# EAGLE board ZX_Distance_and_Gesture_Sensor_PTH_Panel_v10 (EAGLE 6.6.0), part 1 of 5
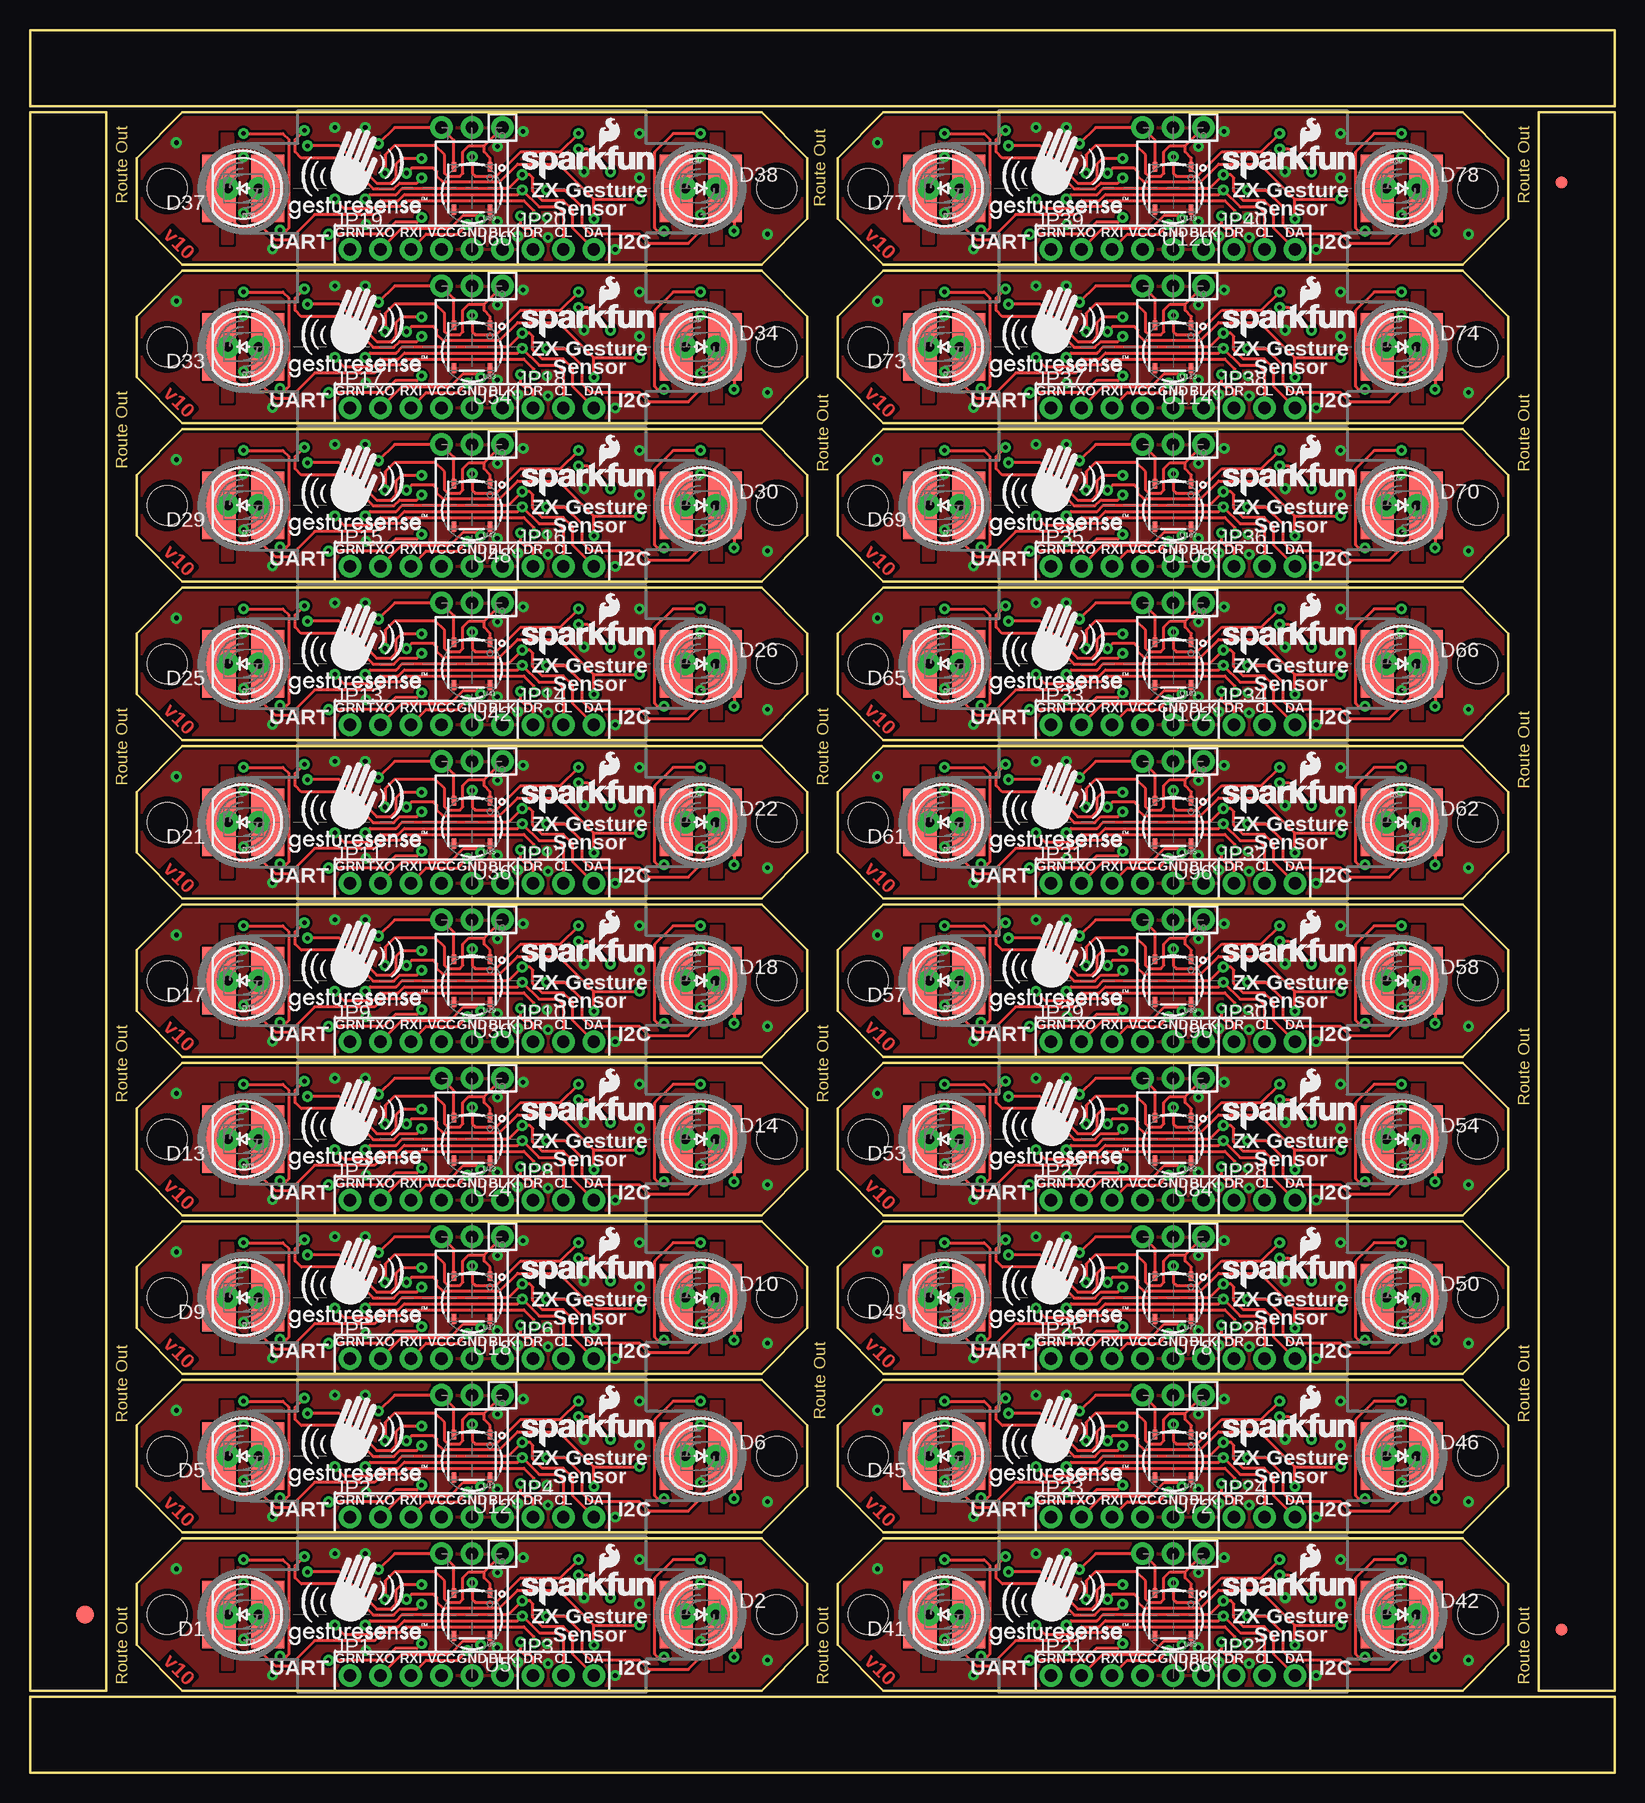
[diagram p0: board, top side]
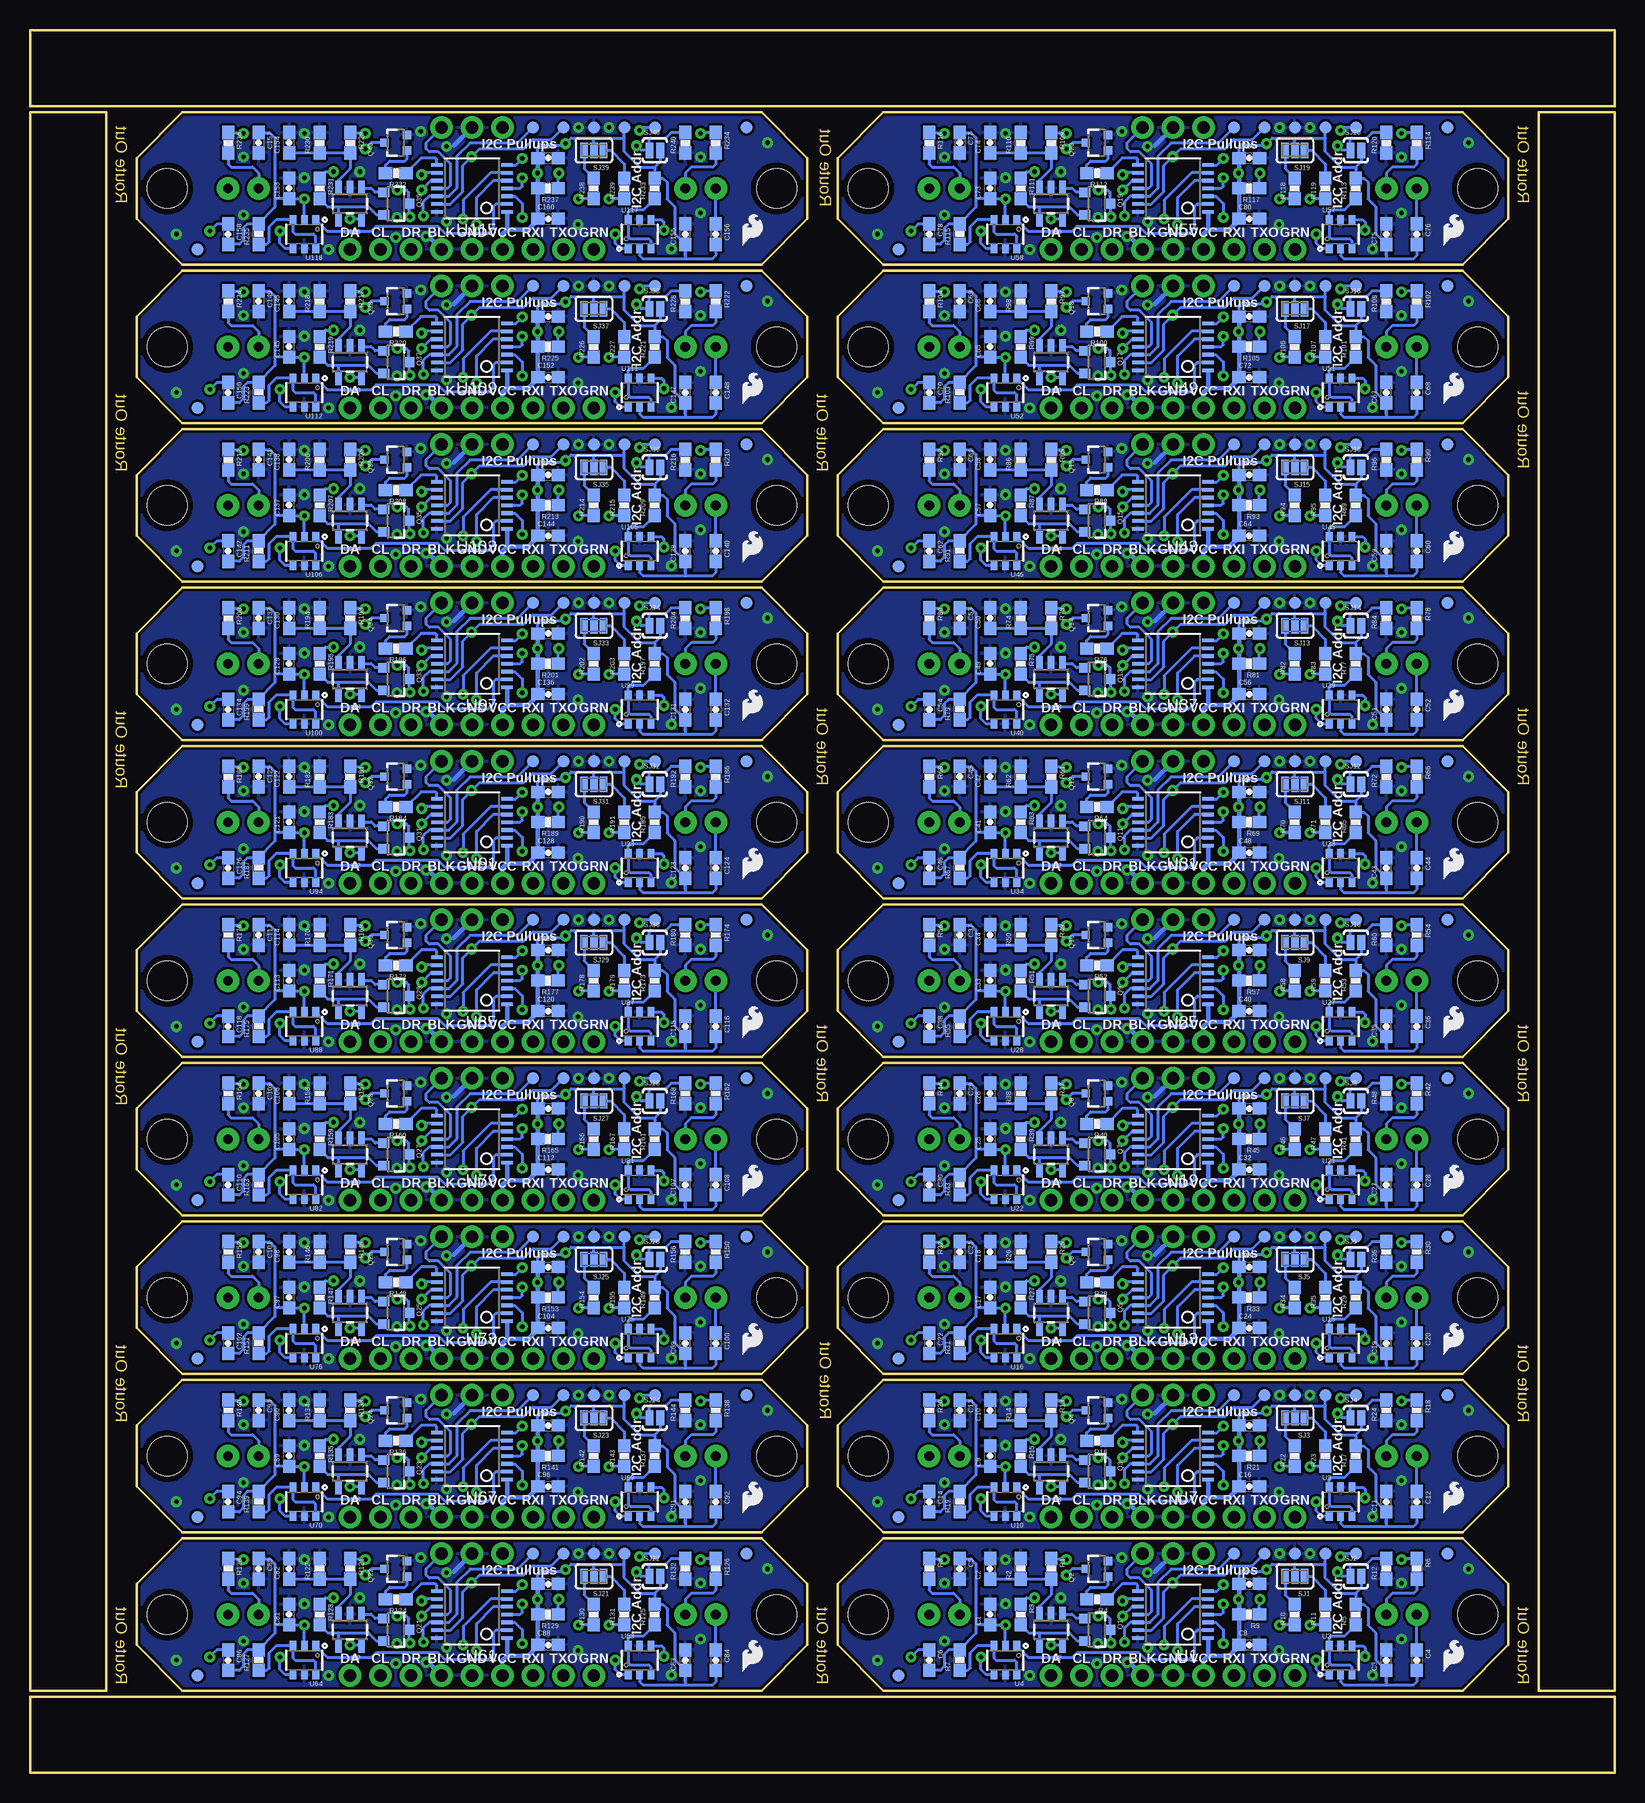
[diagram p1: board, bottom side, seen from below]

Size 132.08 x 145.29 mm. Coordinates in mm from the lower left corner, seen from the top.
Outline: 12.7,19.56 60.96,19.56 64.77,15.75 64.77,10.67 60.96,6.86 12.7,6.86 8.89,10.67 8.89,15.75 12.7,19.56
Outline: 12.7,32.77 60.96,32.77 64.77,28.96 64.77,23.88 60.96,20.07 12.7,20.07 8.89,23.88 8.89,28.96 12.7,32.77
Outline: 12.7,45.97 60.96,45.97 64.77,42.16 64.77,37.08 60.96,33.27 12.7,33.27 8.89,37.08 8.89,42.16 12.7,45.97
Outline: 12.7,59.18 60.96,59.18 64.77,55.37 64.77,50.29 60.96,46.48 12.7,46.48 8.89,50.29 8.89,55.37 12.7,59.18
Outline: 12.7,72.39 60.96,72.39 64.77,68.58 64.77,63.5 60.96,59.69 12.7,59.69 8.89,63.5 8.89,68.58 12.7,72.39
Outline: 12.7,85.6 60.96,85.6 64.77,81.79 64.77,76.71 60.96,72.9 12.7,72.9 8.89,76.71 8.89,81.79 12.7,85.6
Outline: 12.7,98.81 60.96,98.81 64.77,95 64.77,89.92 60.96,86.11 12.7,86.11 8.89,89.92 8.89,95 12.7,98.81
Outline: 12.7,112.01 60.96,112.01 64.77,108.2 64.77,103.12 60.96,99.31 12.7,99.31 8.89,103.12 8.89,108.2 12.7,112.01
Outline: 12.7,125.22 60.96,125.22 64.77,121.41 64.77,116.33 60.96,112.52 12.7,112.52 8.89,116.33 8.89,121.41 12.7,125.22
Outline: 12.7,138.43 60.96,138.43 64.77,134.62 64.77,129.54 60.96,125.73 12.7,125.73 8.89,129.54 8.89,134.62 12.7,138.43
Outline: 71.12,19.56 119.38,19.56 123.19,15.75 123.19,10.67 119.38,6.86 71.12,6.86 67.31,10.67 67.31,15.75 71.12,19.56
Outline: 71.12,32.77 119.38,32.77 123.19,28.96 123.19,23.88 119.38,20.07 71.12,20.07 67.31,23.88 67.31,28.96 71.12,32.77
Outline: 71.12,45.97 119.38,45.97 123.19,42.16 123.19,37.08 119.38,33.27 71.12,33.27 67.31,37.08 67.31,42.16 71.12,45.97
Outline: 71.12,59.18 119.38,59.18 123.19,55.37 123.19,50.29 119.38,46.48 71.12,46.48 67.31,50.29 67.31,55.37 71.12,59.18
Outline: 71.12,72.39 119.38,72.39 123.19,68.58 123.19,63.5 119.38,59.69 71.12,59.69 67.31,63.5 67.31,68.58 71.12,72.39
Outline: 71.12,85.6 119.38,85.6 123.19,81.79 123.19,76.71 119.38,72.9 71.12,72.9 67.31,76.71 67.31,81.79 71.12,85.6
Outline: 71.12,98.81 119.38,98.81 123.19,95 123.19,89.92 119.38,86.11 71.12,86.11 67.31,89.92 67.31,95 71.12,98.81
Outline: 71.12,112.01 119.38,112.01 123.19,108.2 123.19,103.12 119.38,99.31 71.12,99.31 67.31,103.12 67.31,108.2 71.12,112.01
Outline: 71.12,125.22 119.38,125.22 123.19,121.41 123.19,116.33 119.38,112.52 71.12,112.52 67.31,116.33 67.31,121.41 71.12,125.22
Outline: 71.12,138.43 119.38,138.43 123.19,134.62 123.19,129.54 119.38,125.73 71.12,125.73 67.31,129.54 67.31,134.62 71.12,138.43
Outline: 6.35,6.86 6.35,138.43 0,138.43 0,6.86 6.35,6.86
Outline: 132.08,6.86 132.08,138.43 125.73,138.43 125.73,6.86 132.08,6.86
Outline: 0,138.94 132.08,138.94 132.08,145.29 0,145.29 0,138.94
Outline: 132.08,6.35 0,6.35 0,0 132.08,0 132.08,6.35
Copper layers (1*16): Top 0.035mm / dielectric 1.5mm / Bottom 0.035mm
Design rules "SparkFun-2-layer": minimum track width 7mil, minimum drill 15mil, track to track 8mil, track to pad 8mil, pad to pad 8mil, via to via 8mil, smd to smd 8mil, copper to edge 8mil, drill to drill 8mil, minimum pad ring 12mil, minimum via ring 10mil, stop-mask expansion 4mil, vias tented up to drill 20mil, thermal gap 10mil
bRestrict: 40 lines

## Footprints (pad centres in the part's own frame; a part is rotated, then mirrored left to right if it is on the bottom)
0603-CAP = smd 1.1 x 1: 1 -0.85,0; 2 0.85,0
LED5MM = drill 0.813 pad 1.88: A -1.27,0; K 1.27,0
SFH4641-SHORT2 = smd 5.62 x 2.77: A 0,-2.035; C 0,2.035
FIDUCIAL-1.5X3 = smd 1.5 x 1.5: 1 0,0
FIDUCIAL-1X2 = smd 1 x 1: 1 0,0
1X06_NO_SILK = drill 1.016 pad 1.88: 1 0,0; 2 2.54,0; 3 5.08,0; 4 7.62,0; 5 10.16,0; 6 12.7,0
1X03_NO_SILK = drill 1.016 pad 1.88: 1 0,0; 2 2.54,0; 3 5.08,0
SOT23-3 = smd 0.8 x 0.9: 1 -0.95,-1; 2 0.95,-1; 3 0,1.1
SOT323 = smd 0.7 x 0.7: 1 -0.65,-0.925; 2 0.65,-0.925; 3 0,0.925
0603-RES = smd 1.1 x 1: 1 -0.85,0; 2 0.85,0
PAD-JUMPER-3-NC_BY_PASTE_YES_SILK_FULL_BOX = smd 0.635 x 1.27: 1 -0.813,0; 2 0,0; 3 0.813,0
PAD-JUMPER-2-NO_YES_SILK = smd 0.635 x 1.27: 1 -0.45,0; 2 0.45,0
STAND-OFF = hole 3.302: 0,0
PAD.03X.04 = smd 1.016 x 1.016: P$1 0,0
TSSOP14 = smd 0.305 x 0.991: 1 -1.95,-2.918; 2 -1.3,-2.918; 3 -0.65,-2.918; 4 0,-2.918; 5 0.65,-2.918; 6 1.3,-2.918; 7 1.95,-2.918; 8 1.95,2.918; 9 1.3,2.918; 10 0.65,2.918; 11 0,2.918; 12 -0.65,2.918; 13 -1.3,2.918; 14 -1.95,2.918
SOT23-5 = smd 0.55 x 1.2: 1 -0.95,-1.3; 2 0,-1.3; 3 0.95,-1.3; 4 0.95,1.3; 5 -0.95,1.3
SOT26 = smd 0.55 x 0.8: D1 -0.95,1.2; D2 0.95,1.2; G1 -0.95,-1.2; G2 0.95,-1.2; S1 0,1.2; S2 0,-1.2
BRM-2508_VERT = drill 1.016 pad 1.88: 1 -2.54,0; 2 0,0; 3 2.54,0
TSOP572 = smd 0.35 x 0.8: 1 -1.5,-1.775; 5 1.5,-1.775; 6 1.5,1.775; 8 -1.5,1.775

## Placement (x,y rotation side)
C1  0.1uF  [0603-CAP]  52.07,13.21 90 bottom
C2  DNP  [0603-CAP]  52.07,17.02 90 bottom
C3  0.1uF  [0603-CAP]  19.05,9.4 90 bottom
C4  10nF  [0603-CAP]  16.51,9.4 270 bottom
C5  0.1uF  [0603-CAP]  54.61,17.02 270 bottom
C6  10nF  [0603-CAP]  57.15,9.4 270 bottom
C7  4.7uF  [0603-CAP]  30.48,15.75 0 bottom
C8  0.1uF  [0603-CAP]  30.48,10.67 0 bottom
C9  0.1uF  [0603-CAP]  52.07,26.42 90 bottom
C10  DNP  [0603-CAP]  52.07,30.23 90 bottom
C11  0.1uF  [0603-CAP]  19.05,22.61 90 bottom
C12  10nF  [0603-CAP]  16.51,22.61 270 bottom
C13  0.1uF  [0603-CAP]  54.61,30.23 270 bottom
C14  10nF  [0603-CAP]  57.15,22.61 270 bottom
C15  4.7uF  [0603-CAP]  30.48,28.96 0 bottom
C16  0.1uF  [0603-CAP]  30.48,23.88 0 bottom
C17  0.1uF  [0603-CAP]  52.07,39.62 90 bottom
C18  DNP  [0603-CAP]  52.07,43.43 90 bottom
C19  0.1uF  [0603-CAP]  19.05,35.81 90 bottom
C20  10nF  [0603-CAP]  16.51,35.81 270 bottom
C21  0.1uF  [0603-CAP]  54.61,43.43 270 bottom
C22  10nF  [0603-CAP]  57.15,35.81 270 bottom
C23  4.7uF  [0603-CAP]  30.48,42.16 0 bottom
C24  0.1uF  [0603-CAP]  30.48,37.08 0 bottom
C25  0.1uF  [0603-CAP]  52.07,52.83 90 bottom
C26  DNP  [0603-CAP]  52.07,56.64 90 bottom
C27  0.1uF  [0603-CAP]  19.05,49.02 90 bottom
C28  10nF  [0603-CAP]  16.51,49.02 270 bottom
C29  0.1uF  [0603-CAP]  54.61,56.64 270 bottom
C30  10nF  [0603-CAP]  57.15,49.02 270 bottom
C31  4.7uF  [0603-CAP]  30.48,55.37 0 bottom
C32  0.1uF  [0603-CAP]  30.48,50.29 0 bottom
C33  0.1uF  [0603-CAP]  52.07,66.04 90 bottom
C34  DNP  [0603-CAP]  52.07,69.85 90 bottom
C35  0.1uF  [0603-CAP]  19.05,62.23 90 bottom
C36  10nF  [0603-CAP]  16.51,62.23 270 bottom
C37  0.1uF  [0603-CAP]  54.61,69.85 270 bottom
C38  10nF  [0603-CAP]  57.15,62.23 270 bottom
C39  4.7uF  [0603-CAP]  30.48,68.58 0 bottom
C40  0.1uF  [0603-CAP]  30.48,63.5 0 bottom
C41  0.1uF  [0603-CAP]  52.07,79.25 90 bottom
C42  DNP  [0603-CAP]  52.07,83.06 90 bottom
C43  0.1uF  [0603-CAP]  19.05,75.44 90 bottom
C44  10nF  [0603-CAP]  16.51,75.44 270 bottom
C45  0.1uF  [0603-CAP]  54.61,83.06 270 bottom
C46  10nF  [0603-CAP]  57.15,75.44 270 bottom
C47  4.7uF  [0603-CAP]  30.48,81.79 0 bottom
C48  0.1uF  [0603-CAP]  30.48,76.71 0 bottom
C49  0.1uF  [0603-CAP]  52.07,92.46 90 bottom
C50  DNP  [0603-CAP]  52.07,96.27 90 bottom
C51  0.1uF  [0603-CAP]  19.05,88.65 90 bottom
C52  10nF  [0603-CAP]  16.51,88.65 270 bottom
C53  0.1uF  [0603-CAP]  54.61,96.27 270 bottom
C54  10nF  [0603-CAP]  57.15,88.65 270 bottom
C55  4.7uF  [0603-CAP]  30.48,95 0 bottom
C56  0.1uF  [0603-CAP]  30.48,89.92 0 bottom
C57  0.1uF  [0603-CAP]  52.07,105.66 90 bottom
C58  DNP  [0603-CAP]  52.07,109.47 90 bottom
C59  0.1uF  [0603-CAP]  19.05,101.85 90 bottom
C60  10nF  [0603-CAP]  16.51,101.85 270 bottom
C61  0.1uF  [0603-CAP]  54.61,109.47 270 bottom
C62  10nF  [0603-CAP]  57.15,101.85 270 bottom
C63  4.7uF  [0603-CAP]  30.48,108.2 0 bottom
C64  0.1uF  [0603-CAP]  30.48,103.12 0 bottom
C65  0.1uF  [0603-CAP]  52.07,118.87 90 bottom
C66  DNP  [0603-CAP]  52.07,122.68 90 bottom
C67  0.1uF  [0603-CAP]  19.05,115.06 90 bottom
C68  10nF  [0603-CAP]  16.51,115.06 270 bottom
C69  0.1uF  [0603-CAP]  54.61,122.68 270 bottom
C70  10nF  [0603-CAP]  57.15,115.06 270 bottom
C71  4.7uF  [0603-CAP]  30.48,121.41 0 bottom
C72  0.1uF  [0603-CAP]  30.48,116.33 0 bottom
C73  0.1uF  [0603-CAP]  52.07,132.08 90 bottom
C74  DNP  [0603-CAP]  52.07,135.89 90 bottom
C75  0.1uF  [0603-CAP]  19.05,128.27 90 bottom
C76  10nF  [0603-CAP]  16.51,128.27 270 bottom
C77  0.1uF  [0603-CAP]  54.61,135.89 270 bottom
C78  10nF  [0603-CAP]  57.15,128.27 270 bottom
C79  4.7uF  [0603-CAP]  30.48,134.62 0 bottom
C80  0.1uF  [0603-CAP]  30.48,129.54 0 bottom
C81  0.1uF  [0603-CAP]  110.49,13.21 90 bottom
C82  DNP  [0603-CAP]  110.49,17.02 90 bottom
C83  0.1uF  [0603-CAP]  77.47,9.4 90 bottom
C84  10nF  [0603-CAP]  74.93,9.4 270 bottom
C85  0.1uF  [0603-CAP]  113.03,17.02 270 bottom
C86  10nF  [0603-CAP]  115.57,9.4 270 bottom
C87  4.7uF  [0603-CAP]  88.9,15.75 0 bottom
C88  0.1uF  [0603-CAP]  88.9,10.67 0 bottom
C89  0.1uF  [0603-CAP]  110.49,26.42 90 bottom
C90  DNP  [0603-CAP]  110.49,30.23 90 bottom
C91  0.1uF  [0603-CAP]  77.47,22.61 90 bottom
C92  10nF  [0603-CAP]  74.93,22.61 270 bottom
C93  0.1uF  [0603-CAP]  113.03,30.23 270 bottom
C94  10nF  [0603-CAP]  115.57,22.61 270 bottom
C95  4.7uF  [0603-CAP]  88.9,28.96 0 bottom
C96  0.1uF  [0603-CAP]  88.9,23.88 0 bottom
C97  0.1uF  [0603-CAP]  110.49,39.62 90 bottom
C98  DNP  [0603-CAP]  110.49,43.43 90 bottom
C99  0.1uF  [0603-CAP]  77.47,35.81 90 bottom
C100  10nF  [0603-CAP]  74.93,35.81 270 bottom
C101  0.1uF  [0603-CAP]  113.03,43.43 270 bottom
C102  10nF  [0603-CAP]  115.57,35.81 270 bottom
C103  4.7uF  [0603-CAP]  88.9,42.16 0 bottom
C104  0.1uF  [0603-CAP]  88.9,37.08 0 bottom
C105  0.1uF  [0603-CAP]  110.49,52.83 90 bottom
C106  DNP  [0603-CAP]  110.49,56.64 90 bottom
C107  0.1uF  [0603-CAP]  77.47,49.02 90 bottom
C108  10nF  [0603-CAP]  74.93,49.02 270 bottom
C109  0.1uF  [0603-CAP]  113.03,56.64 270 bottom
C110  10nF  [0603-CAP]  115.57,49.02 270 bottom
C111  4.7uF  [0603-CAP]  88.9,55.37 0 bottom
C112  0.1uF  [0603-CAP]  88.9,50.29 0 bottom
C113  0.1uF  [0603-CAP]  110.49,66.04 90 bottom
C114  DNP  [0603-CAP]  110.49,69.85 90 bottom
C115  0.1uF  [0603-CAP]  77.47,62.23 90 bottom
C116  10nF  [0603-CAP]  74.93,62.23 270 bottom
C117  0.1uF  [0603-CAP]  113.03,69.85 270 bottom
C118  10nF  [0603-CAP]  115.57,62.23 270 bottom
C119  4.7uF  [0603-CAP]  88.9,68.58 0 bottom
C120  0.1uF  [0603-CAP]  88.9,63.5 0 bottom
C121  0.1uF  [0603-CAP]  110.49,79.25 90 bottom
C122  DNP  [0603-CAP]  110.49,83.06 90 bottom
C123  0.1uF  [0603-CAP]  77.47,75.44 90 bottom
C124  10nF  [0603-CAP]  74.93,75.44 270 bottom
C125  0.1uF  [0603-CAP]  113.03,83.06 270 bottom
C126  10nF  [0603-CAP]  115.57,75.44 270 bottom
C127  4.7uF  [0603-CAP]  88.9,81.79 0 bottom
C128  0.1uF  [0603-CAP]  88.9,76.71 0 bottom
C129  0.1uF  [0603-CAP]  110.49,92.46 90 bottom
C130  DNP  [0603-CAP]  110.49,96.27 90 bottom
C131  0.1uF  [0603-CAP]  77.47,88.65 90 bottom
C132  10nF  [0603-CAP]  74.93,88.65 270 bottom
C133  0.1uF  [0603-CAP]  113.03,96.27 270 bottom
C134  10nF  [0603-CAP]  115.57,88.65 270 bottom
C135  4.7uF  [0603-CAP]  88.9,95 0 bottom
C136  0.1uF  [0603-CAP]  88.9,89.92 0 bottom
C137  0.1uF  [0603-CAP]  110.49,105.66 90 bottom
C138  DNP  [0603-CAP]  110.49,109.47 90 bottom
C139  0.1uF  [0603-CAP]  77.47,101.85 90 bottom
C140  10nF  [0603-CAP]  74.93,101.85 270 bottom
C141  0.1uF  [0603-CAP]  113.03,109.47 270 bottom
C142  10nF  [0603-CAP]  115.57,101.85 270 bottom
C143  4.7uF  [0603-CAP]  88.9,108.2 0 bottom
C144  0.1uF  [0603-CAP]  88.9,103.12 0 bottom
C145  0.1uF  [0603-CAP]  110.49,118.87 90 bottom
C146  DNP  [0603-CAP]  110.49,122.68 90 bottom
C147  0.1uF  [0603-CAP]  77.47,115.06 90 bottom
C148  10nF  [0603-CAP]  74.93,115.06 270 bottom
C149  0.1uF  [0603-CAP]  113.03,122.68 270 bottom
C150  10nF  [0603-CAP]  115.57,115.06 270 bottom
C151  4.7uF  [0603-CAP]  88.9,121.41 0 bottom
C152  0.1uF  [0603-CAP]  88.9,116.33 0 bottom
C153  0.1uF  [0603-CAP]  110.49,132.08 90 bottom
C154  DNP  [0603-CAP]  110.49,135.89 90 bottom
C155  0.1uF  [0603-CAP]  77.47,128.27 90 bottom
C156  10nF  [0603-CAP]  74.93,128.27 270 bottom
C157  0.1uF  [0603-CAP]  113.03,135.89 270 bottom
C158  10nF  [0603-CAP]  115.57,128.27 270 bottom
C159  4.7uF  [0603-CAP]  88.9,134.62 0 bottom
C160  0.1uF  [0603-CAP]  88.9,129.54 0 bottom
D1  LED-IR-THRUTSAL6100  [LED5MM]  17.78,13.21 180 top
D2  LED-IR-THRUTSAL6100  [LED5MM]  55.88,13.21 0 top
D3  SFH4641SHORT2  [SFH4641-SHORT2]  17.78,13.21 90 top
D4  SFH4641SHORT2  [SFH4641-SHORT2]  55.88,13.21 270 top
D5  LED-IR-THRUTSAL6100  [LED5MM]  17.78,26.42 180 top
D6  LED-IR-THRUTSAL6100  [LED5MM]  55.88,26.42 0 top
D7  SFH4641SHORT2  [SFH4641-SHORT2]  17.78,26.42 90 top
D8  SFH4641SHORT2  [SFH4641-SHORT2]  55.88,26.42 270 top
D9  LED-IR-THRUTSAL6100  [LED5MM]  17.78,39.62 180 top
D10  LED-IR-THRUTSAL6100  [LED5MM]  55.88,39.62 0 top
D11  SFH4641SHORT2  [SFH4641-SHORT2]  17.78,39.62 90 top
D12  SFH4641SHORT2  [SFH4641-SHORT2]  55.88,39.62 270 top
D13  LED-IR-THRUTSAL6100  [LED5MM]  17.78,52.83 180 top
D14  LED-IR-THRUTSAL6100  [LED5MM]  55.88,52.83 0 top
D15  SFH4641SHORT2  [SFH4641-SHORT2]  17.78,52.83 90 top
D16  SFH4641SHORT2  [SFH4641-SHORT2]  55.88,52.83 270 top
D17  LED-IR-THRUTSAL6100  [LED5MM]  17.78,66.04 180 top
D18  LED-IR-THRUTSAL6100  [LED5MM]  55.88,66.04 0 top
D19  SFH4641SHORT2  [SFH4641-SHORT2]  17.78,66.04 90 top
D20  SFH4641SHORT2  [SFH4641-SHORT2]  55.88,66.04 270 top
D21  LED-IR-THRUTSAL6100  [LED5MM]  17.78,79.25 180 top
D22  LED-IR-THRUTSAL6100  [LED5MM]  55.88,79.25 0 top
D23  SFH4641SHORT2  [SFH4641-SHORT2]  17.78,79.25 90 top
D24  SFH4641SHORT2  [SFH4641-SHORT2]  55.88,79.25 270 top
D25  LED-IR-THRUTSAL6100  [LED5MM]  17.78,92.46 180 top
D26  LED-IR-THRUTSAL6100  [LED5MM]  55.88,92.46 0 top
D27  SFH4641SHORT2  [SFH4641-SHORT2]  17.78,92.46 90 top
D28  SFH4641SHORT2  [SFH4641-SHORT2]  55.88,92.46 270 top
D29  LED-IR-THRUTSAL6100  [LED5MM]  17.78,105.66 180 top
D30  LED-IR-THRUTSAL6100  [LED5MM]  55.88,105.66 0 top
D31  SFH4641SHORT2  [SFH4641-SHORT2]  17.78,105.66 90 top
D32  SFH4641SHORT2  [SFH4641-SHORT2]  55.88,105.66 270 top
D33  LED-IR-THRUTSAL6100  [LED5MM]  17.78,118.87 180 top
D34  LED-IR-THRUTSAL6100  [LED5MM]  55.88,118.87 0 top
D35  SFH4641SHORT2  [SFH4641-SHORT2]  17.78,118.87 90 top
D36  SFH4641SHORT2  [SFH4641-SHORT2]  55.88,118.87 270 top
D37  LED-IR-THRUTSAL6100  [LED5MM]  17.78,132.08 180 top
D38  LED-IR-THRUTSAL6100  [LED5MM]  55.88,132.08 0 top
D39  SFH4641SHORT2  [SFH4641-SHORT2]  17.78,132.08 90 top
D40  SFH4641SHORT2  [SFH4641-SHORT2]  55.88,132.08 270 top
D41  LED-IR-THRUTSAL6100  [LED5MM]  76.2,13.21 180 top
D42  LED-IR-THRUTSAL6100  [LED5MM]  114.3,13.21 0 top
D43  SFH4641SHORT2  [SFH4641-SHORT2]  76.2,13.21 90 top
D44  SFH4641SHORT2  [SFH4641-SHORT2]  114.3,13.21 270 top
D45  LED-IR-THRUTSAL6100  [LED5MM]  76.2,26.42 180 top
D46  LED-IR-THRUTSAL6100  [LED5MM]  114.3,26.42 0 top
D47  SFH4641SHORT2  [SFH4641-SHORT2]  76.2,26.42 90 top
D48  SFH4641SHORT2  [SFH4641-SHORT2]  114.3,26.42 270 top
D49  LED-IR-THRUTSAL6100  [LED5MM]  76.2,39.62 180 top
D50  LED-IR-THRUTSAL6100  [LED5MM]  114.3,39.62 0 top
D51  SFH4641SHORT2  [SFH4641-SHORT2]  76.2,39.62 90 top
D52  SFH4641SHORT2  [SFH4641-SHORT2]  114.3,39.62 270 top
D53  LED-IR-THRUTSAL6100  [LED5MM]  76.2,52.83 180 top
D54  LED-IR-THRUTSAL6100  [LED5MM]  114.3,52.83 0 top
D55  SFH4641SHORT2  [SFH4641-SHORT2]  76.2,52.83 90 top
D56  SFH4641SHORT2  [SFH4641-SHORT2]  114.3,52.83 270 top
D57  LED-IR-THRUTSAL6100  [LED5MM]  76.2,66.04 180 top
D58  LED-IR-THRUTSAL6100  [LED5MM]  114.3,66.04 0 top
D59  SFH4641SHORT2  [SFH4641-SHORT2]  76.2,66.04 90 top
D60  SFH4641SHORT2  [SFH4641-SHORT2]  114.3,66.04 270 top
D61  LED-IR-THRUTSAL6100  [LED5MM]  76.2,79.25 180 top
D62  LED-IR-THRUTSAL6100  [LED5MM]  114.3,79.25 0 top
D63  SFH4641SHORT2  [SFH4641-SHORT2]  76.2,79.25 90 top
D64  SFH4641SHORT2  [SFH4641-SHORT2]  114.3,79.25 270 top
D65  LED-IR-THRUTSAL6100  [LED5MM]  76.2,92.46 180 top
D66  LED-IR-THRUTSAL6100  [LED5MM]  114.3,92.46 0 top
D67  SFH4641SHORT2  [SFH4641-SHORT2]  76.2,92.46 90 top
D68  SFH4641SHORT2  [SFH4641-SHORT2]  114.3,92.46 270 top
D69  LED-IR-THRUTSAL6100  [LED5MM]  76.2,105.66 180 top
D70  LED-IR-THRUTSAL6100  [LED5MM]  114.3,105.66 0 top
D71  SFH4641SHORT2  [SFH4641-SHORT2]  76.2,105.66 90 top
D72  SFH4641SHORT2  [SFH4641-SHORT2]  114.3,105.66 270 top
D73  LED-IR-THRUTSAL6100  [LED5MM]  76.2,118.87 180 top
D74  LED-IR-THRUTSAL6100  [LED5MM]  114.3,118.87 0 top
D75  SFH4641SHORT2  [SFH4641-SHORT2]  76.2,118.87 90 top
D76  SFH4641SHORT2  [SFH4641-SHORT2]  114.3,118.87 270 top
D77  LED-IR-THRUTSAL6100  [LED5MM]  76.2,132.08 180 top
D78  LED-IR-THRUTSAL6100  [LED5MM]  114.3,132.08 0 top
D79  SFH4641SHORT2  [SFH4641-SHORT2]  76.2,132.08 90 top
D80  SFH4641SHORT2  [SFH4641-SHORT2]  114.3,132.08 270 top
E$1  [FIDUCIAL-1.5X3]  4.57,13.21 0 top
E$2  [FIDUCIAL-1X2]  127.64,11.94 0 top
E$5  [FIDUCIAL-1X2]  127.64,132.59 180 top
FID1  FIDUCIAL1X2  [FIDUCIAL-1X2]  13.97,18.29 0 bottom
FID2  FIDUCIAL1X2  [FIDUCIAL-1X2]  59.69,8.13 0 bottom
FID3  FIDUCIAL1X2  [FIDUCIAL-1X2]  13.97,31.5 0 bottom
FID4  FIDUCIAL1X2  [FIDUCIAL-1X2]  59.69,21.34 0 bottom
FID5  FIDUCIAL1X2  [FIDUCIAL-1X2]  13.97,44.7 0 bottom
FID6  FIDUCIAL1X2  [FIDUCIAL-1X2]  59.69,34.54 0 bottom
FID7  FIDUCIAL1X2  [FIDUCIAL-1X2]  13.97,57.91 0 bottom
FID8  FIDUCIAL1X2  [FIDUCIAL-1X2]  59.69,47.75 0 bottom
FID9  FIDUCIAL1X2  [FIDUCIAL-1X2]  13.97,71.12 0 bottom
FID10  FIDUCIAL1X2  [FIDUCIAL-1X2]  59.69,60.96 0 bottom
FID11  FIDUCIAL1X2  [FIDUCIAL-1X2]  13.97,84.33 0 bottom
FID12  FIDUCIAL1X2  [FIDUCIAL-1X2]  59.69,74.17 0 bottom
FID13  FIDUCIAL1X2  [FIDUCIAL-1X2]  13.97,97.54 0 bottom
FID14  FIDUCIAL1X2  [FIDUCIAL-1X2]  59.69,87.38 0 bottom
FID15  FIDUCIAL1X2  [FIDUCIAL-1X2]  13.97,110.74 0 bottom
FID16  FIDUCIAL1X2  [FIDUCIAL-1X2]  59.69,100.58 0 bottom
FID17  FIDUCIAL1X2  [FIDUCIAL-1X2]  13.97,123.95 0 bottom
FID18  FIDUCIAL1X2  [FIDUCIAL-1X2]  59.69,113.79 0 bottom
FID19  FIDUCIAL1X2  [FIDUCIAL-1X2]  13.97,137.16 0 bottom
FID20  FIDUCIAL1X2  [FIDUCIAL-1X2]  59.69,127 0 bottom
FID21  FIDUCIAL1X2  [FIDUCIAL-1X2]  72.39,18.29 0 bottom
FID22  FIDUCIAL1X2  [FIDUCIAL-1X2]  118.11,8.13 0 bottom
FID23  FIDUCIAL1X2  [FIDUCIAL-1X2]  72.39,31.5 0 bottom
FID24  FIDUCIAL1X2  [FIDUCIAL-1X2]  118.11,21.34 0 bottom
FID25  FIDUCIAL1X2  [FIDUCIAL-1X2]  72.39,44.7 0 bottom
FID26  FIDUCIAL1X2  [FIDUCIAL-1X2]  118.11,34.54 0 bottom
FID27  FIDUCIAL1X2  [FIDUCIAL-1X2]  72.39,57.91 0 bottom
FID28  FIDUCIAL1X2  [FIDUCIAL-1X2]  118.11,47.75 0 bottom
FID29  FIDUCIAL1X2  [FIDUCIAL-1X2]  72.39,71.12 0 bottom
FID30  FIDUCIAL1X2  [FIDUCIAL-1X2]  118.11,60.96 0 bottom
FID31  FIDUCIAL1X2  [FIDUCIAL-1X2]  72.39,84.33 0 bottom
FID32  FIDUCIAL1X2  [FIDUCIAL-1X2]  118.11,74.17 0 bottom
FID33  FIDUCIAL1X2  [FIDUCIAL-1X2]  72.39,97.54 0 bottom
FID34  FIDUCIAL1X2  [FIDUCIAL-1X2]  118.11,87.38 0 bottom
FID35  FIDUCIAL1X2  [FIDUCIAL-1X2]  72.39,110.74 0 bottom
FID36  FIDUCIAL1X2  [FIDUCIAL-1X2]  118.11,100.58 0 bottom
FID37  FIDUCIAL1X2  [FIDUCIAL-1X2]  72.39,123.95 0 bottom
FID38  FIDUCIAL1X2  [FIDUCIAL-1X2]  118.11,113.79 0 bottom
FID39  FIDUCIAL1X2  [FIDUCIAL-1X2]  72.39,137.16 0 bottom
FID40  FIDUCIAL1X2  [FIDUCIAL-1X2]  118.11,127 0 bottom
JP1  [1X06_NO_SILK]  26.67,8.13 0 top
JP2  [1X06_NO_SILK]  26.67,21.34 0 top
JP3  [1X03_NO_SILK]  41.91,8.13 0 top
JP4  [1X03_NO_SILK]  41.91,21.34 0 top
JP5  [1X06_NO_SILK]  26.67,34.54 0 top
JP6  [1X03_NO_SILK]  41.91,34.54 0 top
JP7  [1X06_NO_SILK]  26.67,47.75 0 top
JP8  [1X03_NO_SILK]  41.91,47.75 0 top
JP9  [1X06_NO_SILK]  26.67,60.96 0 top
JP10  [1X03_NO_SILK]  41.91,60.96 0 top
JP11  [1X06_NO_SILK]  26.67,74.17 0 top
JP12  [1X03_NO_SILK]  41.91,74.17 0 top
JP13  [1X06_NO_SILK]  26.67,87.38 0 top
JP14  [1X03_NO_SILK]  41.91,87.38 0 top
JP15  [1X06_NO_SILK]  26.67,100.58 0 top
JP16  [1X03_NO_SILK]  41.91,100.58 0 top
JP17  [1X06_NO_SILK]  26.67,113.79 0 top
JP18  [1X03_NO_SILK]  41.91,113.79 0 top
JP19  [1X06_NO_SILK]  26.67,127 0 top
JP20  [1X03_NO_SILK]  41.91,127 0 top
JP21  [1X06_NO_SILK]  85.09,8.13 0 top
JP22  [1X03_NO_SILK]  100.33,8.13 0 top
JP23  [1X06_NO_SILK]  85.09,21.34 0 top
JP24  [1X03_NO_SILK]  100.33,21.34 0 top
JP25  [1X06_NO_SILK]  85.09,34.54 0 top
JP26  [1X03_NO_SILK]  100.33,34.54 0 top
JP27  [1X06_NO_SILK]  85.09,47.75 0 top
JP28  [1X03_NO_SILK]  100.33,47.75 0 top
JP29  [1X06_NO_SILK]  85.09,60.96 0 top
JP30  [1X03_NO_SILK]  100.33,60.96 0 top
JP31  [1X06_NO_SILK]  85.09,74.17 0 top
JP32  [1X03_NO_SILK]  100.33,74.17 0 top
JP33  [1X06_NO_SILK]  85.09,87.38 0 top
JP34  [1X03_NO_SILK]  100.33,87.38 0 top
JP35  [1X06_NO_SILK]  85.09,100.58 0 top
JP36  [1X03_NO_SILK]  100.33,100.58 0 top
JP37  [1X06_NO_SILK]  85.09,113.79 0 top
JP38  [1X03_NO_SILK]  100.33,113.79 0 top
JP39  [1X06_NO_SILK]  85.09,127 0 top
JP40  [1X03_NO_SILK]  100.33,127 0 top
LOGO1  SFE_LOGO_FLAME.1_INCH  [SFE_LOGO_FLAME_.1]  14.61,8.13 0 bottom
LOGO2  SFE_LOGO_FLAME.1_INCH  [SFE_LOGO_FLAME_.1]  14.61,21.34 0 bottom
LOGO3  SFE_LOGO_FLAME.1_INCH  [SFE_LOGO_FLAME_.1]  14.61,34.54 0 bottom
LOGO4  SFE_LOGO_FLAME.1_INCH  [SFE_LOGO_FLAME_.1]  14.61,47.75 0 bottom
LOGO5  SFE_LOGO_FLAME.1_INCH  [SFE_LOGO_FLAME_.1]  14.61,60.96 0 bottom
LOGO6  SFE_LOGO_FLAME.1_INCH  [SFE_LOGO_FLAME_.1]  14.61,74.17 0 bottom
LOGO7  SFE_LOGO_FLAME.1_INCH  [SFE_LOGO_FLAME_.1]  14.61,87.38 0 bottom
LOGO8  SFE_LOGO_FLAME.1_INCH  [SFE_LOGO_FLAME_.1]  14.61,100.58 0 bottom
LOGO9  SFE_LOGO_FLAME.1_INCH  [SFE_LOGO_FLAME_.1]  14.61,113.79 0 bottom
LOGO10  SFE_LOGO_FLAME.1_INCH  [SFE_LOGO_FLAME_.1]  14.61,127 0 bottom
LOGO11  SFE_LOGO_FLAME.1_INCH  [SFE_LOGO_FLAME_.1]  73.03,8.13 0 bottom
LOGO12  SFE_LOGO_FLAME.1_INCH  [SFE_LOGO_FLAME_.1]  73.03,21.34 0 bottom
LOGO13  SFE_LOGO_FLAME.1_INCH  [SFE_LOGO_FLAME_.1]  73.03,34.54 0 bottom
LOGO14  SFE_LOGO_FLAME.1_INCH  [SFE_LOGO_FLAME_.1]  73.03,47.75 0 bottom
LOGO15  SFE_LOGO_FLAME.1_INCH  [SFE_LOGO_FLAME_.1]  73.03,60.96 0 bottom
LOGO16  SFE_LOGO_FLAME.1_INCH  [SFE_LOGO_FLAME_.1]  73.03,74.17 0 bottom
LOGO17  SFE_LOGO_FLAME.1_INCH  [SFE_LOGO_FLAME_.1]  73.03,87.38 0 bottom
LOGO18  SFE_LOGO_FLAME.1_INCH  [SFE_LOGO_FLAME_.1]  73.03,100.58 0 bottom
LOGO19  SFE_LOGO_FLAME.1_INCH  [SFE_LOGO_FLAME_.1]  73.03,113.79 0 bottom
LOGO20  SFE_LOGO_FLAME.1_INCH  [SFE_LOGO_FLAME_.1]  73.03,127 0 bottom
Q1  MMBT2222A  [SOT23-3]  43.18,11.94 270 bottom
Q2  MOSFET-NCHANNEL2N7002PW  [SOT323]  43.18,17.02 90 bottom
Q3  MMBT2222A  [SOT23-3]  43.18,25.15 270 bottom
Q4  MOSFET-NCHANNEL2N7002PW  [SOT323]  43.18,30.23 90 bottom
Q5  MMBT2222A  [SOT23-3]  43.18,38.35 270 bottom
Q6  MOSFET-NCHANNEL2N7002PW  [SOT323]  43.18,43.43 90 bottom
Q7  MMBT2222A  [SOT23-3]  43.18,51.56 270 bottom
Q8  MOSFET-NCHANNEL2N7002PW  [SOT323]  43.18,56.64 90 bottom
Q9  MMBT2222A  [SOT23-3]  43.18,64.77 270 bottom
Q10  MOSFET-NCHANNEL2N7002PW  [SOT323]  43.18,69.85 90 bottom
Q11  MMBT2222A  [SOT23-3]  43.18,77.98 270 bottom
Q12  MOSFET-NCHANNEL2N7002PW  [SOT323]  43.18,83.06 90 bottom
Q13  MMBT2222A  [SOT23-3]  43.18,91.19 270 bottom
Q14  MOSFET-NCHANNEL2N7002PW  [SOT323]  43.18,96.27 90 bottom
Q15  MMBT2222A  [SOT23-3]  43.18,104.39 270 bottom
Q16  MOSFET-NCHANNEL2N7002PW  [SOT323]  43.18,109.47 90 bottom
Q17  MMBT2222A  [SOT23-3]  43.18,117.6 270 bottom
Q18  MOSFET-NCHANNEL2N7002PW  [SOT323]  43.18,122.68 90 bottom
Q19  MMBT2222A  [SOT23-3]  43.18,130.81 270 bottom
Q20  MOSFET-NCHANNEL2N7002PW  [SOT323]  43.18,135.89 90 bottom
Q21  MMBT2222A  [SOT23-3]  101.6,11.94 270 bottom
Q22  MOSFET-NCHANNEL2N7002PW  [SOT323]  101.6,17.02 90 bottom
Q23  MMBT2222A  [SOT23-3]  101.6,25.15 270 bottom
Q24  MOSFET-NCHANNEL2N7002PW  [SOT323]  101.6,30.23 90 bottom
Q25  MMBT2222A  [SOT23-3]  101.6,38.35 270 bottom
Q26  MOSFET-NCHANNEL2N7002PW  [SOT323]  101.6,43.43 90 bottom
Q27  MMBT2222A  [SOT23-3]  101.6,51.56 270 bottom
Q28  MOSFET-NCHANNEL2N7002PW  [SOT323]  101.6,56.64 90 bottom
Q29  MMBT2222A  [SOT23-3]  101.6,64.77 270 bottom
Q30  MOSFET-NCHANNEL2N7002PW  [SOT323]  101.6,69.85 90 bottom
Q31  MMBT2222A  [SOT23-3]  101.6,77.98 270 bottom
Q32  MOSFET-NCHANNEL2N7002PW  [SOT323]  101.6,83.06 90 bottom
Q33  MMBT2222A  [SOT23-3]  101.6,91.19 270 bottom
Q34  MOSFET-NCHANNEL2N7002PW  [SOT323]  101.6,96.27 90 bottom
Q35  MMBT2222A  [SOT23-3]  101.6,104.39 270 bottom
Q36  MOSFET-NCHANNEL2N7002PW  [SOT323]  101.6,109.47 90 bottom
Q37  MMBT2222A  [SOT23-3]  101.6,117.6 270 bottom
Q38  MOSFET-NCHANNEL2N7002PW  [SOT323]  101.6,122.68 90 bottom
Q39  MMBT2222A  [SOT23-3]  101.6,130.81 270 bottom
Q40  MOSFET-NCHANNEL2N7002PW  [SOT323]  101.6,135.89 90 bottom
R1  100k  [0603-RES]  46.99,17.02 270 bottom
R2  100k  [0603-RES]  49.53,17.02 90 bottom
R3  10  [0603-RES]  49.53,13.21 270 bottom
R4  1K  [0603-RES]  43.18,14.48 180 bottom
R5  100k  [0603-RES]  21.59,13.21 90 bottom
R6  1  [0603-RES]  16.51,17.02 270 bottom
R7  100k  [0603-RES]  54.61,9.4 90 bottom
R8  1  [0603-RES]  57.15,17.02 270 bottom
R9  1K  [0603-RES]  30.48,13.21 180 bottom
R10  4.7K  [0603-RES]  26.67,13.21 90 bottom
R11  4.7K  [0603-RES]  24.13,13.21 90 bottom
R12  10K  [0603-RES]  19.05,17.02 90 bottom
R13  100k  [0603-RES]  46.99,30.23 270 bottom
R14  100k  [0603-RES]  49.53,30.23 90 bottom
R15  10  [0603-RES]  49.53,26.42 270 bottom
R16  1K  [0603-RES]  43.18,27.69 180 bottom
R17  100k  [0603-RES]  21.59,26.42 90 bottom
R18  1  [0603-RES]  16.51,30.23 270 bottom
R19  100k  [0603-RES]  54.61,22.61 90 bottom
R20  1  [0603-RES]  57.15,30.23 270 bottom
R21  1K  [0603-RES]  30.48,26.42 180 bottom
R22  4.7K  [0603-RES]  26.67,26.42 90 bottom
R23  4.7K  [0603-RES]  24.13,26.42 90 bottom
R24  10K  [0603-RES]  19.05,30.23 90 bottom
R25  100k  [0603-RES]  46.99,43.43 270 bottom
R26  100k  [0603-RES]  49.53,43.43 90 bottom
R27  10  [0603-RES]  49.53,39.62 270 bottom
R28  1K  [0603-RES]  43.18,40.89 180 bottom
R29  100k  [0603-RES]  21.59,39.62 90 bottom
R30  1  [0603-RES]  16.51,43.43 270 bottom
R31  100k  [0603-RES]  54.61,35.81 90 bottom
R32  1  [0603-RES]  57.15,43.43 270 bottom
R33  1K  [0603-RES]  30.48,39.62 180 bottom
R34  4.7K  [0603-RES]  26.67,39.62 90 bottom
R35  4.7K  [0603-RES]  24.13,39.62 90 bottom
R36  10K  [0603-RES]  19.05,43.43 90 bottom
R37  100k  [0603-RES]  46.99,56.64 270 bottom
R38  100k  [0603-RES]  49.53,56.64 90 bottom
R39  10  [0603-RES]  49.53,52.83 270 bottom
R40  1K  [0603-RES]  43.18,54.1 180 bottom
R41  100k  [0603-RES]  21.59,52.83 90 bottom
R42  1  [0603-RES]  16.51,56.64 270 bottom
R43  100k  [0603-RES]  54.61,49.02 90 bottom
R44  1  [0603-RES]  57.15,56.64 270 bottom
R45  1K  [0603-RES]  30.48,52.83 180 bottom
R46  4.7K  [0603-RES]  26.67,52.83 90 bottom
R47  4.7K  [0603-RES]  24.13,52.83 90 bottom
R48  10K  [0603-RES]  19.05,56.64 90 bottom
R49  100k  [0603-RES]  46.99,69.85 270 bottom
R50  100k  [0603-RES]  49.53,69.85 90 bottom
R51  10  [0603-RES]  49.53,66.04 270 bottom
R52  1K  [0603-RES]  43.18,67.31 180 bottom
R53  100k  [0603-RES]  21.59,66.04 90 bottom
R54  1  [0603-RES]  16.51,69.85 270 bottom
R55  100k  [0603-RES]  54.61,62.23 90 bottom
R56  1  [0603-RES]  57.15,69.85 270 bottom
R57  1K  [0603-RES]  30.48,66.04 180 bottom
R58  4.7K  [0603-RES]  26.67,66.04 90 bottom
R59  4.7K  [0603-RES]  24.13,66.04 90 bottom
R60  10K  [0603-RES]  19.05,69.85 90 bottom
R61  100k  [0603-RES]  46.99,83.06 270 bottom
R62  100k  [0603-RES]  49.53,83.06 90 bottom
R63  10  [0603-RES]  49.53,79.25 270 bottom
R64  1K  [0603-RES]  43.18,80.52 180 bottom
R65  100k  [0603-RES]  21.59,79.25 90 bottom
R66  1  [0603-RES]  16.51,83.06 270 bottom
R67  100k  [0603-RES]  54.61,75.44 90 bottom
R68  1  [0603-RES]  57.15,83.06 270 bottom
R69  1K  [0603-RES]  30.48,79.25 180 bottom
R70  4.7K  [0603-RES]  26.67,79.25 90 bottom
R71  4.7K  [0603-RES]  24.13,79.25 90 bottom
R72  10K  [0603-RES]  19.05,83.06 90 bottom
R73  100k  [0603-RES]  46.99,96.27 270 bottom
R74  100k  [0603-RES]  49.53,96.27 90 bottom
R75  10  [0603-RES]  49.53,92.46 270 bottom
R76  1K  [0603-RES]  43.18,93.73 180 bottom
R77  100k  [0603-RES]  21.59,92.46 90 bottom
R78  1  [0603-RES]  16.51,96.27 270 bottom
R79  100k  [0603-RES]  54.61,88.65 90 bottom
R80  1  [0603-RES]  57.15,96.27 270 bottom
R81  1K  [0603-RES]  30.48,92.46 180 bottom
R82  4.7K  [0603-RES]  26.67,92.46 90 bottom
R83  4.7K  [0603-RES]  24.13,92.46 90 bottom
R84  10K  [0603-RES]  19.05,96.27 90 bottom
R85  100k  [0603-RES]  46.99,109.47 270 bottom
R86  100k  [0603-RES]  49.53,109.47 90 bottom
R87  10  [0603-RES]  49.53,105.66 270 bottom
R88  1K  [0603-RES]  43.18,106.93 180 bottom
R89  100k  [0603-RES]  21.59,105.66 90 bottom
R90  1  [0603-RES]  16.51,109.47 270 bottom
R91  100k  [0603-RES]  54.61,101.85 90 bottom
R92  1  [0603-RES]  57.15,109.47 270 bottom
R93  1K  [0603-RES]  30.48,105.66 180 bottom
R94  4.7K  [0603-RES]  26.67,105.66 90 bottom
R95  4.7K  [0603-RES]  24.13,105.66 90 bottom
R96  10K  [0603-RES]  19.05,109.47 90 bottom
R97  100k  [0603-RES]  46.99,122.68 270 bottom
R98  100k  [0603-RES]  49.53,122.68 90 bottom
R99  10  [0603-RES]  49.53,118.87 270 bottom
R100  1K  [0603-RES]  43.18,120.14 180 bottom
R101  100k  [0603-RES]  21.59,118.87 90 bottom
R102  1  [0603-RES]  16.51,122.68 270 bottom
R103  100k  [0603-RES]  54.61,115.06 90 bottom
R104  1  [0603-RES]  57.15,122.68 270 bottom
R105  1K  [0603-RES]  30.48,118.87 180 bottom
R106  4.7K  [0603-RES]  26.67,118.87 90 bottom
R107  4.7K  [0603-RES]  24.13,118.87 90 bottom
R108  10K  [0603-RES]  19.05,122.68 90 bottom
R109  100k  [0603-RES]  46.99,135.89 270 bottom
R110  100k  [0603-RES]  49.53,135.89 90 bottom
R111  10  [0603-RES]  49.53,132.08 270 bottom
R112  1K  [0603-RES]  43.18,133.35 180 bottom
R113  100k  [0603-RES]  21.59,132.08 90 bottom
R114  1  [0603-RES]  16.51,135.89 270 bottom
R115  100k  [0603-RES]  54.61,128.27 90 bottom
R116  1  [0603-RES]  57.15,135.89 270 bottom
R117  1K  [0603-RES]  30.48,132.08 180 bottom
R118  4.7K  [0603-RES]  26.67,132.08 90 bottom
R119  4.7K  [0603-RES]  24.13,132.08 90 bottom
R120  10K  [0603-RES]  19.05,135.89 90 bottom
R121  100k  [0603-RES]  105.41,17.02 270 bottom
R122  100k  [0603-RES]  107.95,17.02 90 bottom
R123  10  [0603-RES]  107.95,13.21 270 bottom
R124  1K  [0603-RES]  101.6,14.48 180 bottom
R125  100k  [0603-RES]  80.01,13.21 90 bottom
R126  1  [0603-RES]  74.93,17.02 270 bottom
R127  100k  [0603-RES]  113.03,9.4 90 bottom
R128  1  [0603-RES]  115.57,17.02 270 bottom
R129  1K  [0603-RES]  88.9,13.21 180 bottom
R130  4.7K  [0603-RES]  85.09,13.21 90 bottom
R131  4.7K  [0603-RES]  82.55,13.21 90 bottom
R132  10K  [0603-RES]  77.47,17.02 90 bottom
R133  100k  [0603-RES]  105.41,30.23 270 bottom
R134  100k  [0603-RES]  107.95,30.23 90 bottom
R135  10  [0603-RES]  107.95,26.42 270 bottom
R136  1K  [0603-RES]  101.6,27.69 180 bottom
R137  100k  [0603-RES]  80.01,26.42 90 bottom
R138  1  [0603-RES]  74.93,30.23 270 bottom
R139  100k  [0603-RES]  113.03,22.61 90 bottom
R140  1  [0603-RES]  115.57,30.23 270 bottom
R141  1K  [0603-RES]  88.9,26.42 180 bottom
R142  4.7K  [0603-RES]  85.09,26.42 90 bottom
R143  4.7K  [0603-RES]  82.55,26.42 90 bottom
R144  10K  [0603-RES]  77.47,30.23 90 bottom
R145  100k  [0603-RES]  105.41,43.43 270 bottom
R146  100k  [0603-RES]  107.95,43.43 90 bottom
R147  10  [0603-RES]  107.95,39.62 270 bottom
R148  1K  [0603-RES]  101.6,40.89 180 bottom
R149  100k  [0603-RES]  80.01,39.62 90 bottom
R150  1  [0603-RES]  74.93,43.43 270 bottom
R151  100k  [0603-RES]  113.03,35.81 90 bottom
R152  1  [0603-RES]  115.57,43.43 270 bottom
R153  1K  [0603-RES]  88.9,39.62 180 bottom
R154  4.7K  [0603-RES]  85.09,39.62 90 bottom
R155  4.7K  [0603-RES]  82.55,39.62 90 bottom
R156  10K  [0603-RES]  77.47,43.43 90 bottom
R157  100k  [0603-RES]  105.41,56.64 270 bottom
R158  100k  [0603-RES]  107.95,56.64 90 bottom
R159  10  [0603-RES]  107.95,52.83 270 bottom
R160  1K  [0603-RES]  101.6,54.1 180 bottom
R161  100k  [0603-RES]  80.01,52.83 90 bottom
R162  1  [0603-RES]  74.93,56.64 270 bottom
R163  100k  [0603-RES]  113.03,49.02 90 bottom
R164  1  [0603-RES]  115.57,56.64 270 bottom
R165  1K  [0603-RES]  88.9,52.83 180 bottom
R166  4.7K  [0603-RES]  85.09,52.83 90 bottom
R167  4.7K  [0603-RES]  82.55,52.83 90 bottom
R168  10K  [0603-RES]  77.47,56.64 90 bottom
R169  100k  [0603-RES]  105.41,69.85 270 bottom
R170  100k  [0603-RES]  107.95,69.85 90 bottom
R171  10  [0603-RES]  107.95,66.04 270 bottom
R172  1K  [0603-RES]  101.6,67.31 180 bottom
R173  100k  [0603-RES]  80.01,66.04 90 bottom
R174  1  [0603-RES]  74.93,69.85 270 bottom
R175  100k  [0603-RES]  113.03,62.23 90 bottom
R176  1  [0603-RES]  115.57,69.85 270 bottom
R177  1K  [0603-RES]  88.9,66.04 180 bottom
R178  4.7K  [0603-RES]  85.09,66.04 90 bottom
R179  4.7K  [0603-RES]  82.55,66.04 90 bottom
R180  10K  [0603-RES]  77.47,69.85 90 bottom
R181  100k  [0603-RES]  105.41,83.06 270 bottom
R182  100k  [0603-RES]  107.95,83.06 90 bottom
R183  10  [0603-RES]  107.95,79.25 270 bottom
R184  1K  [0603-RES]  101.6,80.52 180 bottom
R185  100k  [0603-RES]  80.01,79.25 90 bottom
R186  1  [0603-RES]  74.93,83.06 270 bottom
R187  100k  [0603-RES]  113.03,75.44 90 bottom
R188  1  [0603-RES]  115.57,83.06 270 bottom
R189  1K  [0603-RES]  88.9,79.25 180 bottom
R190  4.7K  [0603-RES]  85.09,79.25 90 bottom
R191  4.7K  [0603-RES]  82.55,79.25 90 bottom
R192  10K  [0603-RES]  77.47,83.06 90 bottom
R193  100k  [0603-RES]  105.41,96.27 270 bottom
R194  100k  [0603-RES]  107.95,96.27 90 bottom
R195  10  [0603-RES]  107.95,92.46 270 bottom
R196  1K  [0603-RES]  101.6,93.73 180 bottom
R197  100k  [0603-RES]  80.01,92.46 90 bottom
R198  1  [0603-RES]  74.93,96.27 270 bottom
R199  100k  [0603-RES]  113.03,88.65 90 bottom
R200  1  [0603-RES]  115.57,96.27 270 bottom
R201  1K  [0603-RES]  88.9,92.46 180 bottom
R202  4.7K  [0603-RES]  85.09,92.46 90 bottom
R203  4.7K  [0603-RES]  82.55,92.46 90 bottom
R204  10K  [0603-RES]  77.47,96.27 90 bottom
R205  100k  [0603-RES]  105.41,109.47 270 bottom
R206  100k  [0603-RES]  107.95,109.47 90 bottom
R207  10  [0603-RES]  107.95,105.66 270 bottom
R208  1K  [0603-RES]  101.6,106.93 180 bottom
R209  100k  [0603-RES]  80.01,105.66 90 bottom
R210  1  [0603-RES]  74.93,109.47 270 bottom
R211  100k  [0603-RES]  113.03,101.85 90 bottom
R212  1  [0603-RES]  115.57,109.47 270 bottom
R213  1K  [0603-RES]  88.9,105.66 180 bottom
R214  4.7K  [0603-RES]  85.09,105.66 90 bottom
R215  4.7K  [0603-RES]  82.55,105.66 90 bottom
R216  10K  [0603-RES]  77.47,109.47 90 bottom
R217  100k  [0603-RES]  105.41,122.68 270 bottom
R218  100k  [0603-RES]  107.95,122.68 90 bottom
R219  10  [0603-RES]  107.95,118.87 270 bottom
R220  1K  [0603-RES]  101.6,120.14 180 bottom
R221  100k  [0603-RES]  80.01,118.87 90 bottom
R222  1  [0603-RES]  74.93,122.68 270 bottom
R223  100k  [0603-RES]  113.03,115.06 90 bottom
R224  1  [0603-RES]  115.57,122.68 270 bottom
R225  1K  [0603-RES]  88.9,118.87 180 bottom
R226  4.7K  [0603-RES]  85.09,118.87 90 bottom
R227  4.7K  [0603-RES]  82.55,118.87 90 bottom
R228  10K  [0603-RES]  77.47,122.68 90 bottom
R229  100k  [0603-RES]  105.41,135.89 270 bottom
R230  100k  [0603-RES]  107.95,135.89 90 bottom
R231  10  [0603-RES]  107.95,132.08 270 bottom
R232  1K  [0603-RES]  101.6,133.35 180 bottom
R233  100k  [0603-RES]  80.01,132.08 90 bottom
R234  1  [0603-RES]  74.93,135.89 270 bottom
R235  100k  [0603-RES]  113.03,128.27 90 bottom
R236  1  [0603-RES]  115.57,135.89 270 bottom
R237  1K  [0603-RES]  88.9,132.08 180 bottom
R238  4.7K  [0603-RES]  85.09,132.08 90 bottom
R239  4.7K  [0603-RES]  82.55,132.08 90 bottom
R240  10K  [0603-RES]  77.47,135.89 90 bottom
SJ1  JUMPER-PAD-3-NC_BY_PASTE  [PAD-JUMPER-3-NC_BY_PASTE_YES_SILK_FULL_BOX]  26.67,16.38 180 bottom
SJ2  JUMPER-PAD-2-NOYES_SILK  [PAD-JUMPER-2-NO_YES_SILK]  21.59,16.38 0 bottom
SJ3  JUMPER-PAD-3-NC_BY_PASTE  [PAD-JUMPER-3-NC_BY_PASTE_YES_SILK_FULL_BOX]  26.67,29.59 180 bottom
SJ4  JUMPER-PAD-2-NOYES_SILK  [PAD-JUMPER-2-NO_YES_SILK]  21.59,29.59 0 bottom
SJ5  JUMPER-PAD-3-NC_BY_PASTE  [PAD-JUMPER-3-NC_BY_PASTE_YES_SILK_FULL_BOX]  26.67,42.8 180 bottom
SJ6  JUMPER-PAD-2-NOYES_SILK  [PAD-JUMPER-2-NO_YES_SILK]  21.59,42.8 0 bottom
SJ7  JUMPER-PAD-3-NC_BY_PASTE  [PAD-JUMPER-3-NC_BY_PASTE_YES_SILK_FULL_BOX]  26.67,56.01 180 bottom
SJ8  JUMPER-PAD-2-NOYES_SILK  [PAD-JUMPER-2-NO_YES_SILK]  21.59,56.01 0 bottom
SJ9  JUMPER-PAD-3-NC_BY_PASTE  [PAD-JUMPER-3-NC_BY_PASTE_YES_SILK_FULL_BOX]  26.67,69.22 180 bottom
SJ10  JUMPER-PAD-2-NOYES_SILK  [PAD-JUMPER-2-NO_YES_SILK]  21.59,69.22 0 bottom
SJ11  JUMPER-PAD-3-NC_BY_PASTE  [PAD-JUMPER-3-NC_BY_PASTE_YES_SILK_FULL_BOX]  26.67,82.42 180 bottom
SJ12  JUMPER-PAD-2-NOYES_SILK  [PAD-JUMPER-2-NO_YES_SILK]  21.59,82.42 0 bottom
SJ13  JUMPER-PAD-3-NC_BY_PASTE  [PAD-JUMPER-3-NC_BY_PASTE_YES_SILK_FULL_BOX]  26.67,95.63 180 bottom
SJ14  JUMPER-PAD-2-NOYES_SILK  [PAD-JUMPER-2-NO_YES_SILK]  21.59,95.63 0 bottom
SJ15  JUMPER-PAD-3-NC_BY_PASTE  [PAD-JUMPER-3-NC_BY_PASTE_YES_SILK_FULL_BOX]  26.67,108.84 180 bottom
SJ16  JUMPER-PAD-2-NOYES_SILK  [PAD-JUMPER-2-NO_YES_SILK]  21.59,108.84 0 bottom
SJ17  JUMPER-PAD-3-NC_BY_PASTE  [PAD-JUMPER-3-NC_BY_PASTE_YES_SILK_FULL_BOX]  26.67,122.05 180 bottom
SJ18  JUMPER-PAD-2-NOYES_SILK  [PAD-JUMPER-2-NO_YES_SILK]  21.59,122.05 0 bottom
SJ19  JUMPER-PAD-3-NC_BY_PASTE  [PAD-JUMPER-3-NC_BY_PASTE_YES_SILK_FULL_BOX]  26.67,135.25 180 bottom
SJ20  JUMPER-PAD-2-NOYES_SILK  [PAD-JUMPER-2-NO_YES_SILK]  21.59,135.25 0 bottom
SJ21  JUMPER-PAD-3-NC_BY_PASTE  [PAD-JUMPER-3-NC_BY_PASTE_YES_SILK_FULL_BOX]  85.09,16.38 180 bottom
SJ22  JUMPER-PAD-2-NOYES_SILK  [PAD-JUMPER-2-NO_YES_SILK]  80.01,16.38 0 bottom
SJ23  JUMPER-PAD-3-NC_BY_PASTE  [PAD-JUMPER-3-NC_BY_PASTE_YES_SILK_FULL_BOX]  85.09,29.59 180 bottom
SJ24  JUMPER-PAD-2-NOYES_SILK  [PAD-JUMPER-2-NO_YES_SILK]  80.01,29.59 0 bottom
SJ25  JUMPER-PAD-3-NC_BY_PASTE  [PAD-JUMPER-3-NC_BY_PASTE_YES_SILK_FULL_BOX]  85.09,42.8 180 bottom
SJ26  JUMPER-PAD-2-NOYES_SILK  [PAD-JUMPER-2-NO_YES_SILK]  80.01,42.8 0 bottom
SJ27  JUMPER-PAD-3-NC_BY_PASTE  [PAD-JUMPER-3-NC_BY_PASTE_YES_SILK_FULL_BOX]  85.09,56.01 180 bottom
SJ28  JUMPER-PAD-2-NOYES_SILK  [PAD-JUMPER-2-NO_YES_SILK]  80.01,56.01 0 bottom
SJ29  JUMPER-PAD-3-NC_BY_PASTE  [PAD-JUMPER-3-NC_BY_PASTE_YES_SILK_FULL_BOX]  85.09,69.22 180 bottom
SJ30  JUMPER-PAD-2-NOYES_SILK  [PAD-JUMPER-2-NO_YES_SILK]  80.01,69.22 0 bottom
SJ31  JUMPER-PAD-3-NC_BY_PASTE  [PAD-JUMPER-3-NC_BY_PASTE_YES_SILK_FULL_BOX]  85.09,82.42 180 bottom
SJ32  JUMPER-PAD-2-NOYES_SILK  [PAD-JUMPER-2-NO_YES_SILK]  80.01,82.42 0 bottom
SJ33  JUMPER-PAD-3-NC_BY_PASTE  [PAD-JUMPER-3-NC_BY_PASTE_YES_SILK_FULL_BOX]  85.09,95.63 180 bottom
SJ34  JUMPER-PAD-2-NOYES_SILK  [PAD-JUMPER-2-NO_YES_SILK]  80.01,95.63 0 bottom
SJ35  JUMPER-PAD-3-NC_BY_PASTE  [PAD-JUMPER-3-NC_BY_PASTE_YES_SILK_FULL_BOX]  85.09,108.84 180 bottom
SJ36  JUMPER-PAD-2-NOYES_SILK  [PAD-JUMPER-2-NO_YES_SILK]  80.01,108.84 0 bottom
SJ37  JUMPER-PAD-3-NC_BY_PASTE  [PAD-JUMPER-3-NC_BY_PASTE_YES_SILK_FULL_BOX]  85.09,122.05 180 bottom
SJ38  JUMPER-PAD-2-NOYES_SILK  [PAD-JUMPER-2-NO_YES_SILK]  80.01,122.05 0 bottom
SJ39  JUMPER-PAD-3-NC_BY_PASTE  [PAD-JUMPER-3-NC_BY_PASTE_YES_SILK_FULL_BOX]  85.09,135.25 180 bottom
SJ40  JUMPER-PAD-2-NOYES_SILK  [PAD-JUMPER-2-NO_YES_SILK]  80.01,135.25 0 bottom
STANDOFF1  STAND-OFF  [STAND-OFF]  11.43,13.21 0 top
STANDOFF2  STAND-OFF  [STAND-OFF]  62.23,13.21 0 top
STANDOFF3  STAND-OFF  [STAND-OFF]  11.43,26.42 0 top
STANDOFF4  STAND-OFF  [STAND-OFF]  62.23,26.42 0 top
STANDOFF5  STAND-OFF  [STAND-OFF]  11.43,39.62 0 top
STANDOFF6  STAND-OFF  [STAND-OFF]  62.23,39.62 0 top
STANDOFF7  STAND-OFF  [STAND-OFF]  11.43,52.83 0 top
STANDOFF8  STAND-OFF  [STAND-OFF]  62.23,52.83 0 top
STANDOFF9  STAND-OFF  [STAND-OFF]  11.43,66.04 0 top
STANDOFF10  STAND-OFF  [STAND-OFF]  62.23,66.04 0 top
STANDOFF11  STAND-OFF  [STAND-OFF]  11.43,79.25 0 top
STANDOFF12  STAND-OFF  [STAND-OFF]  62.23,79.25 0 top
STANDOFF13  STAND-OFF  [STAND-OFF]  11.43,92.46 0 top
STANDOFF14  STAND-OFF  [STAND-OFF]  62.23,92.46 0 top
STANDOFF15  STAND-OFF  [STAND-OFF]  11.43,105.66 0 top
STANDOFF16  STAND-OFF  [STAND-OFF]  62.23,105.66 0 top
STANDOFF17  STAND-OFF  [STAND-OFF]  11.43,118.87 0 top
STANDOFF18  STAND-OFF  [STAND-OFF]  62.23,118.87 0 top
STANDOFF19  STAND-OFF  [STAND-OFF]  11.43,132.08 0 top
STANDOFF20  STAND-OFF  [STAND-OFF]  62.23,132.08 0 top
STANDOFF21  STAND-OFF  [STAND-OFF]  69.85,13.21 0 top
STANDOFF22  STAND-OFF  [STAND-OFF]  120.65,13.21 0 top
STANDOFF23  STAND-OFF  [STAND-OFF]  69.85,26.42 0 top
STANDOFF24  STAND-OFF  [STAND-OFF]  120.65,26.42 0 top
STANDOFF25  STAND-OFF  [STAND-OFF]  69.85,39.62 0 top
STANDOFF26  STAND-OFF  [STAND-OFF]  120.65,39.62 0 top
STANDOFF27  STAND-OFF  [STAND-OFF]  69.85,52.83 0 top
STANDOFF28  STAND-OFF  [STAND-OFF]  120.65,52.83 0 top
STANDOFF29  STAND-OFF  [STAND-OFF]  69.85,66.04 0 top
STANDOFF30  STAND-OFF  [STAND-OFF]  120.65,66.04 0 top
STANDOFF31  STAND-OFF  [STAND-OFF]  69.85,79.25 0 top
STANDOFF32  STAND-OFF  [STAND-OFF]  120.65,79.25 0 top
STANDOFF33  STAND-OFF  [STAND-OFF]  69.85,92.46 0 top
STANDOFF34  STAND-OFF  [STAND-OFF]  120.65,92.46 0 top
STANDOFF35  STAND-OFF  [STAND-OFF]  69.85,105.66 0 top
STANDOFF36  STAND-OFF  [STAND-OFF]  120.65,105.66 0 top
STANDOFF37  STAND-OFF  [STAND-OFF]  69.85,118.87 0 top
STANDOFF38  STAND-OFF  [STAND-OFF]  120.65,118.87 0 top
STANDOFF39  STAND-OFF  [STAND-OFF]  69.85,132.08 0 top
STANDOFF40  STAND-OFF  [STAND-OFF]  120.65,132.08 0 top
TP1  TEST-POINT3X4  [PAD.03X.04]  24.13,18.29 90 bottom
TP2  TEST-POINT3X4  [PAD.03X.04]  26.67,18.29 0 bottom
TP3  TEST-POINT3X4  [PAD.03X.04]  21.59,18.29 0 bottom
TP4  TEST-POINT3X4  [PAD.03X.04]  31.75,18.29 0 bottom
TP5  TEST-POINT3X4  [PAD.03X.04]  29.21,18.29 0 bottom
TP6  TEST-POINT3X4  [PAD.03X.04]  24.13,31.5 90 bottom
TP7  TEST-POINT3X4  [PAD.03X.04]  26.67,31.5 0 bottom
TP8  TEST-POINT3X4  [PAD.03X.04]  21.59,31.5 0 bottom
TP9  TEST-POINT3X4  [PAD.03X.04]  31.75,31.5 0 bottom
TP10  TEST-POINT3X4  [PAD.03X.04]  29.21,31.5 0 bottom
TP11  TEST-POINT3X4  [PAD.03X.04]  24.13,44.7 90 bottom
TP12  TEST-POINT3X4  [PAD.03X.04]  26.67,44.7 0 bottom
TP13  TEST-POINT3X4  [PAD.03X.04]  21.59,44.7 0 bottom
TP14  TEST-POINT3X4  [PAD.03X.04]  31.75,44.7 0 bottom
TP15  TEST-POINT3X4  [PAD.03X.04]  29.21,44.7 0 bottom
TP16  TEST-POINT3X4  [PAD.03X.04]  24.13,57.91 90 bottom
TP17  TEST-POINT3X4  [PAD.03X.04]  26.67,57.91 0 bottom
TP18  TEST-POINT3X4  [PAD.03X.04]  21.59,57.91 0 bottom
TP19  TEST-POINT3X4  [PAD.03X.04]  31.75,57.91 0 bottom
TP20  TEST-POINT3X4  [PAD.03X.04]  29.21,57.91 0 bottom
TP21  TEST-POINT3X4  [PAD.03X.04]  24.13,71.12 90 bottom
TP22  TEST-POINT3X4  [PAD.03X.04]  26.67,71.12 0 bottom
TP23  TEST-POINT3X4  [PAD.03X.04]  21.59,71.12 0 bottom
TP24  TEST-POINT3X4  [PAD.03X.04]  31.75,71.12 0 bottom
TP25  TEST-POINT3X4  [PAD.03X.04]  29.21,71.12 0 bottom
TP26  TEST-POINT3X4  [PAD.03X.04]  24.13,84.33 90 bottom
TP27  TEST-POINT3X4  [PAD.03X.04]  26.67,84.33 0 bottom
TP28  TEST-POINT3X4  [PAD.03X.04]  21.59,84.33 0 bottom
TP29  TEST-POINT3X4  [PAD.03X.04]  31.75,84.33 0 bottom
TP30  TEST-POINT3X4  [PAD.03X.04]  29.21,84.33 0 bottom
TP31  TEST-POINT3X4  [PAD.03X.04]  24.13,97.54 90 bottom
TP32  TEST-POINT3X4  [PAD.03X.04]  26.67,97.54 0 bottom
TP33  TEST-POINT3X4  [PAD.03X.04]  21.59,97.54 0 bottom
TP34  TEST-POINT3X4  [PAD.03X.04]  31.75,97.54 0 bottom
TP35  TEST-POINT3X4  [PAD.03X.04]  29.21,97.54 0 bottom
TP36  TEST-POINT3X4  [PAD.03X.04]  24.13,110.74 90 bottom
TP37  TEST-POINT3X4  [PAD.03X.04]  26.67,110.74 0 bottom
TP38  TEST-POINT3X4  [PAD.03X.04]  21.59,110.74 0 bottom
TP39  TEST-POINT3X4  [PAD.03X.04]  31.75,110.74 0 bottom
TP40  TEST-POINT3X4  [PAD.03X.04]  29.21,110.74 0 bottom
TP41  TEST-POINT3X4  [PAD.03X.04]  24.13,123.95 90 bottom
TP42  TEST-POINT3X4  [PAD.03X.04]  26.67,123.95 0 bottom
TP43  TEST-POINT3X4  [PAD.03X.04]  21.59,123.95 0 bottom
TP44  TEST-POINT3X4  [PAD.03X.04]  31.75,123.95 0 bottom
TP45  TEST-POINT3X4  [PAD.03X.04]  29.21,123.95 0 bottom
TP46  TEST-POINT3X4  [PAD.03X.04]  24.13,137.16 90 bottom
TP47  TEST-POINT3X4  [PAD.03X.04]  26.67,137.16 0 bottom
TP48  TEST-POINT3X4  [PAD.03X.04]  21.59,137.16 0 bottom
TP49  TEST-POINT3X4  [PAD.03X.04]  31.75,137.16 0 bottom
TP50  TEST-POINT3X4  [PAD.03X.04]  29.21,137.16 0 bottom
TP51  TEST-POINT3X4  [PAD.03X.04]  82.55,18.29 90 bottom
TP52  TEST-POINT3X4  [PAD.03X.04]  85.09,18.29 0 bottom
TP53  TEST-POINT3X4  [PAD.03X.04]  80.01,18.29 0 bottom
TP54  TEST-POINT3X4  [PAD.03X.04]  90.17,18.29 0 bottom
TP55  TEST-POINT3X4  [PAD.03X.04]  87.63,18.29 0 bottom
TP56  TEST-POINT3X4  [PAD.03X.04]  82.55,31.5 90 bottom
TP57  TEST-POINT3X4  [PAD.03X.04]  85.09,31.5 0 bottom
TP58  TEST-POINT3X4  [PAD.03X.04]  80.01,31.5 0 bottom
TP59  TEST-POINT3X4  [PAD.03X.04]  90.17,31.5 0 bottom
TP60  TEST-POINT3X4  [PAD.03X.04]  87.63,31.5 0 bottom
TP61  TEST-POINT3X4  [PAD.03X.04]  82.55,44.7 90 bottom
TP62  TEST-POINT3X4  [PAD.03X.04]  85.09,44.7 0 bottom
TP63  TEST-POINT3X4  [PAD.03X.04]  80.01,44.7 0 bottom
TP64  TEST-POINT3X4  [PAD.03X.04]  90.17,44.7 0 bottom
TP65  TEST-POINT3X4  [PAD.03X.04]  87.63,44.7 0 bottom
TP66  TEST-POINT3X4  [PAD.03X.04]  82.55,57.91 90 bottom
TP67  TEST-POINT3X4  [PAD.03X.04]  85.09,57.91 0 bottom
TP68  TEST-POINT3X4  [PAD.03X.04]  80.01,57.91 0 bottom
TP69  TEST-POINT3X4  [PAD.03X.04]  90.17,57.91 0 bottom
TP70  TEST-POINT3X4  [PAD.03X.04]  87.63,57.91 0 bottom
TP71  TEST-POINT3X4  [PAD.03X.04]  82.55,71.12 90 bottom
TP72  TEST-POINT3X4  [PAD.03X.04]  85.09,71.12 0 bottom
TP73  TEST-POINT3X4  [PAD.03X.04]  80.01,71.12 0 bottom
TP74  TEST-POINT3X4  [PAD.03X.04]  90.17,71.12 0 bottom
TP75  TEST-POINT3X4  [PAD.03X.04]  87.63,71.12 0 bottom
TP76  TEST-POINT3X4  [PAD.03X.04]  82.55,84.33 90 bottom
TP77  TEST-POINT3X4  [PAD.03X.04]  85.09,84.33 0 bottom
TP78  TEST-POINT3X4  [PAD.03X.04]  80.01,84.33 0 bottom
TP79  TEST-POINT3X4  [PAD.03X.04]  90.17,84.33 0 bottom
TP80  TEST-POINT3X4  [PAD.03X.04]  87.63,84.33 0 bottom
TP81  TEST-POINT3X4  [PAD.03X.04]  82.55,97.54 90 bottom
TP82  TEST-POINT3X4  [PAD.03X.04]  85.09,97.54 0 bottom
TP83  TEST-POINT3X4  [PAD.03X.04]  80.01,97.54 0 bottom
TP84  TEST-POINT3X4  [PAD.03X.04]  90.17,97.54 0 bottom
TP85  TEST-POINT3X4  [PAD.03X.04]  87.63,97.54 0 bottom
TP86  TEST-POINT3X4  [PAD.03X.04]  82.55,110.74 90 bottom
TP87  TEST-POINT3X4  [PAD.03X.04]  85.09,110.74 0 bottom
TP88  TEST-POINT3X4  [PAD.03X.04]  80.01,110.74 0 bottom
TP89  TEST-POINT3X4  [PAD.03X.04]  90.17,110.74 0 bottom
TP90  TEST-POINT3X4  [PAD.03X.04]  87.63,110.74 0 bottom
TP91  TEST-POINT3X4  [PAD.03X.04]  82.55,123.95 90 bottom
TP92  TEST-POINT3X4  [PAD.03X.04]  85.09,123.95 0 bottom
TP93  TEST-POINT3X4  [PAD.03X.04]  80.01,123.95 0 bottom
TP94  TEST-POINT3X4  [PAD.03X.04]  90.17,123.95 0 bottom
TP95  TEST-POINT3X4  [PAD.03X.04]  87.63,123.95 0 bottom
TP96  TEST-POINT3X4  [PAD.03X.04]  82.55,137.16 90 bottom
TP97  TEST-POINT3X4  [PAD.03X.04]  85.09,137.16 0 bottom
TP98  TEST-POINT3X4  [PAD.03X.04]  80.01,137.16 0 bottom
TP99  TEST-POINT3X4  [PAD.03X.04]  90.17,137.16 0 bottom
TP100  TEST-POINT3X4  [PAD.03X.04]  87.63,137.16 0 bottom
U1  PIC16F1823-14PINTSSOP  [TSSOP14]  36.83,13.21 90 bottom
U2  MCP6021T-E/OT  [SOT23-5]  46.99,11.94 180 bottom
U3  DMC2700UDM  [SOT26]  22.86,9.4 0 bottom
U4  DMC2700UDM  [SOT26]  50.8,9.4 180 bottom
U5  BRM-2A18VERT  [BRM-2508_VERT]  36.83,18.29 180 top
U6  TSOP57238TT1  [TSOP572]  36.83,13.21 180 top
U7  PIC16F1823-14PINTSSOP  [TSSOP14]  36.83,26.42 90 bottom
U8  MCP6021T-E/OT  [SOT23-5]  46.99,25.15 180 bottom
U9  DMC2700UDM  [SOT26]  22.86,22.61 0 bottom
U10  DMC2700UDM  [SOT26]  50.8,22.61 180 bottom
U11  TSOP57238TT1  [TSOP572]  36.83,26.42 180 top
U12  BRM-2A18VERT  [BRM-2508_VERT]  36.83,31.5 180 top
U13  PIC16F1823-14PINTSSOP  [TSSOP14]  36.83,39.62 90 bottom
U14  MCP6021T-E/OT  [SOT23-5]  46.99,38.35 180 bottom
U15  DMC2700UDM  [SOT26]  22.86,35.81 0 bottom
U16  DMC2700UDM  [SOT26]  50.8,35.81 180 bottom
U17  TSOP57238TT1  [TSOP572]  36.83,39.62 180 top
U18  BRM-2A18VERT  [BRM-2508_VERT]  36.83,44.7 180 top
U19  PIC16F1823-14PINTSSOP  [TSSOP14]  36.83,52.83 90 bottom
U20  MCP6021T-E/OT  [SOT23-5]  46.99,51.56 180 bottom
U21  DMC2700UDM  [SOT26]  22.86,49.02 0 bottom
U22  DMC2700UDM  [SOT26]  50.8,49.02 180 bottom
U23  TSOP57238TT1  [TSOP572]  36.83,52.83 180 top
U24  BRM-2A18VERT  [BRM-2508_VERT]  36.83,57.91 180 top
U25  PIC16F1823-14PINTSSOP  [TSSOP14]  36.83,66.04 90 bottom
U26  MCP6021T-E/OT  [SOT23-5]  46.99,64.77 180 bottom
U27  DMC2700UDM  [SOT26]  22.86,62.23 0 bottom
U28  DMC2700UDM  [SOT26]  50.8,62.23 180 bottom
U29  TSOP57238TT1  [TSOP572]  36.83,66.04 180 top
U30  BRM-2A18VERT  [BRM-2508_VERT]  36.83,71.12 180 top
U31  PIC16F1823-14PINTSSOP  [TSSOP14]  36.83,79.25 90 bottom
U32  MCP6021T-E/OT  [SOT23-5]  46.99,77.98 180 bottom
U33  DMC2700UDM  [SOT26]  22.86,75.44 0 bottom
U34  DMC2700UDM  [SOT26]  50.8,75.44 180 bottom
U35  TSOP57238TT1  [TSOP572]  36.83,79.25 180 top
U36  BRM-2A18VERT  [BRM-2508_VERT]  36.83,84.33 180 top
U37  PIC16F1823-14PINTSSOP  [TSSOP14]  36.83,92.46 90 bottom
U38  MCP6021T-E/OT  [SOT23-5]  46.99,91.19 180 bottom
U39  DMC2700UDM  [SOT26]  22.86,88.65 0 bottom
U40  DMC2700UDM  [SOT26]  50.8,88.65 180 bottom
U41  TSOP57238TT1  [TSOP572]  36.83,92.46 180 top
U42  BRM-2A18VERT  [BRM-2508_VERT]  36.83,97.54 180 top
U43  PIC16F1823-14PINTSSOP  [TSSOP14]  36.83,105.66 90 bottom
U44  MCP6021T-E/OT  [SOT23-5]  46.99,104.39 180 bottom
U45  DMC2700UDM  [SOT26]  22.86,101.85 0 bottom
U46  DMC2700UDM  [SOT26]  50.8,101.85 180 bottom
U47  TSOP57238TT1  [TSOP572]  36.83,105.66 180 top
U48  BRM-2A18VERT  [BRM-2508_VERT]  36.83,110.74 180 top
U49  PIC16F1823-14PINTSSOP  [TSSOP14]  36.83,118.87 90 bottom
U50  MCP6021T-E/OT  [SOT23-5]  46.99,117.6 180 bottom
U51  DMC2700UDM  [SOT26]  22.86,115.06 0 bottom
U52  DMC2700UDM  [SOT26]  50.8,115.06 180 bottom
U53  TSOP57238TT1  [TSOP572]  36.83,118.87 180 top
U54  BRM-2A18VERT  [BRM-2508_VERT]  36.83,123.95 180 top
U55  PIC16F1823-14PINTSSOP  [TSSOP14]  36.83,132.08 90 bottom
U56  MCP6021T-E/OT  [SOT23-5]  46.99,130.81 180 bottom
U57  DMC2700UDM  [SOT26]  22.86,128.27 0 bottom
U58  DMC2700UDM  [SOT26]  50.8,128.27 180 bottom
U59  TSOP57238TT1  [TSOP572]  36.83,132.08 180 top
U60  BRM-2A18VERT  [BRM-2508_VERT]  36.83,137.16 180 top
U61  PIC16F1823-14PINTSSOP  [TSSOP14]  95.25,13.21 90 bottom
U62  MCP6021T-E/OT  [SOT23-5]  105.41,11.94 180 bottom
U63  DMC2700UDM  [SOT26]  81.28,9.4 0 bottom
U64  DMC2700UDM  [SOT26]  109.22,9.4 180 bottom
U65  TSOP57238TT1  [TSOP572]  95.25,13.21 180 top
U66  BRM-2A18VERT  [BRM-2508_VERT]  95.25,18.29 180 top
U67  PIC16F1823-14PINTSSOP  [TSSOP14]  95.25,26.42 90 bottom
U68  MCP6021T-E/OT  [SOT23-5]  105.41,25.15 180 bottom
U69  DMC2700UDM  [SOT26]  81.28,22.61 0 bottom
U70  DMC2700UDM  [SOT26]  109.22,22.61 180 bottom
U71  TSOP57238TT1  [TSOP572]  95.25,26.42 180 top
U72  BRM-2A18VERT  [BRM-2508_VERT]  95.25,31.5 180 top
U73  PIC16F1823-14PINTSSOP  [TSSOP14]  95.25,39.62 90 bottom
U74  MCP6021T-E/OT  [SOT23-5]  105.41,38.35 180 bottom
U75  DMC2700UDM  [SOT26]  81.28,35.81 0 bottom
U76  DMC2700UDM  [SOT26]  109.22,35.81 180 bottom
U77  TSOP57238TT1  [TSOP572]  95.25,39.62 180 top
U78  BRM-2A18VERT  [BRM-2508_VERT]  95.25,44.7 180 top
U79  PIC16F1823-14PINTSSOP  [TSSOP14]  95.25,52.83 90 bottom
U80  MCP6021T-E/OT  [SOT23-5]  105.41,51.56 180 bottom
U81  DMC2700UDM  [SOT26]  81.28,49.02 0 bottom
U82  DMC2700UDM  [SOT26]  109.22,49.02 180 bottom
U83  TSOP57238TT1  [TSOP572]  95.25,52.83 180 top
U84  BRM-2A18VERT  [BRM-2508_VERT]  95.25,57.91 180 top
U85  PIC16F1823-14PINTSSOP  [TSSOP14]  95.25,66.04 90 bottom
U86  MCP6021T-E/OT  [SOT23-5]  105.41,64.77 180 bottom
U87  DMC2700UDM  [SOT26]  81.28,62.23 0 bottom
U88  DMC2700UDM  [SOT26]  109.22,62.23 180 bottom
U89  TSOP57238TT1  [TSOP572]  95.25,66.04 180 top
U90  BRM-2A18VERT  [BRM-2508_VERT]  95.25,71.12 180 top
U91  PIC16F1823-14PINTSSOP  [TSSOP14]  95.25,79.25 90 bottom
U92  MCP6021T-E/OT  [SOT23-5]  105.41,77.98 180 bottom
U93  DMC2700UDM  [SOT26]  81.28,75.44 0 bottom
U94  DMC2700UDM  [SOT26]  109.22,75.44 180 bottom
U95  TSOP57238TT1  [TSOP572]  95.25,79.25 180 top
U96  BRM-2A18VERT  [BRM-2508_VERT]  95.25,84.33 180 top
U97  PIC16F1823-14PINTSSOP  [TSSOP14]  95.25,92.46 90 bottom
U98  MCP6021T-E/OT  [SOT23-5]  105.41,91.19 180 bottom
U99  DMC2700UDM  [SOT26]  81.28,88.65 0 bottom
U100  DMC2700UDM  [SOT26]  109.22,88.65 180 bottom
U101  TSOP57238TT1  [TSOP572]  95.25,92.46 180 top
U102  BRM-2A18VERT  [BRM-2508_VERT]  95.25,97.54 180 top
U103  PIC16F1823-14PINTSSOP  [TSSOP14]  95.25,105.66 90 bottom
U104  MCP6021T-E/OT  [SOT23-5]  105.41,104.39 180 bottom
U105  DMC2700UDM  [SOT26]  81.28,101.85 0 bottom
U106  DMC2700UDM  [SOT26]  109.22,101.85 180 bottom
U107  TSOP57238TT1  [TSOP572]  95.25,105.66 180 top